# EAGLE board ARTIC_R2-Panel (EAGLE 9.6.2), part 1 of 4
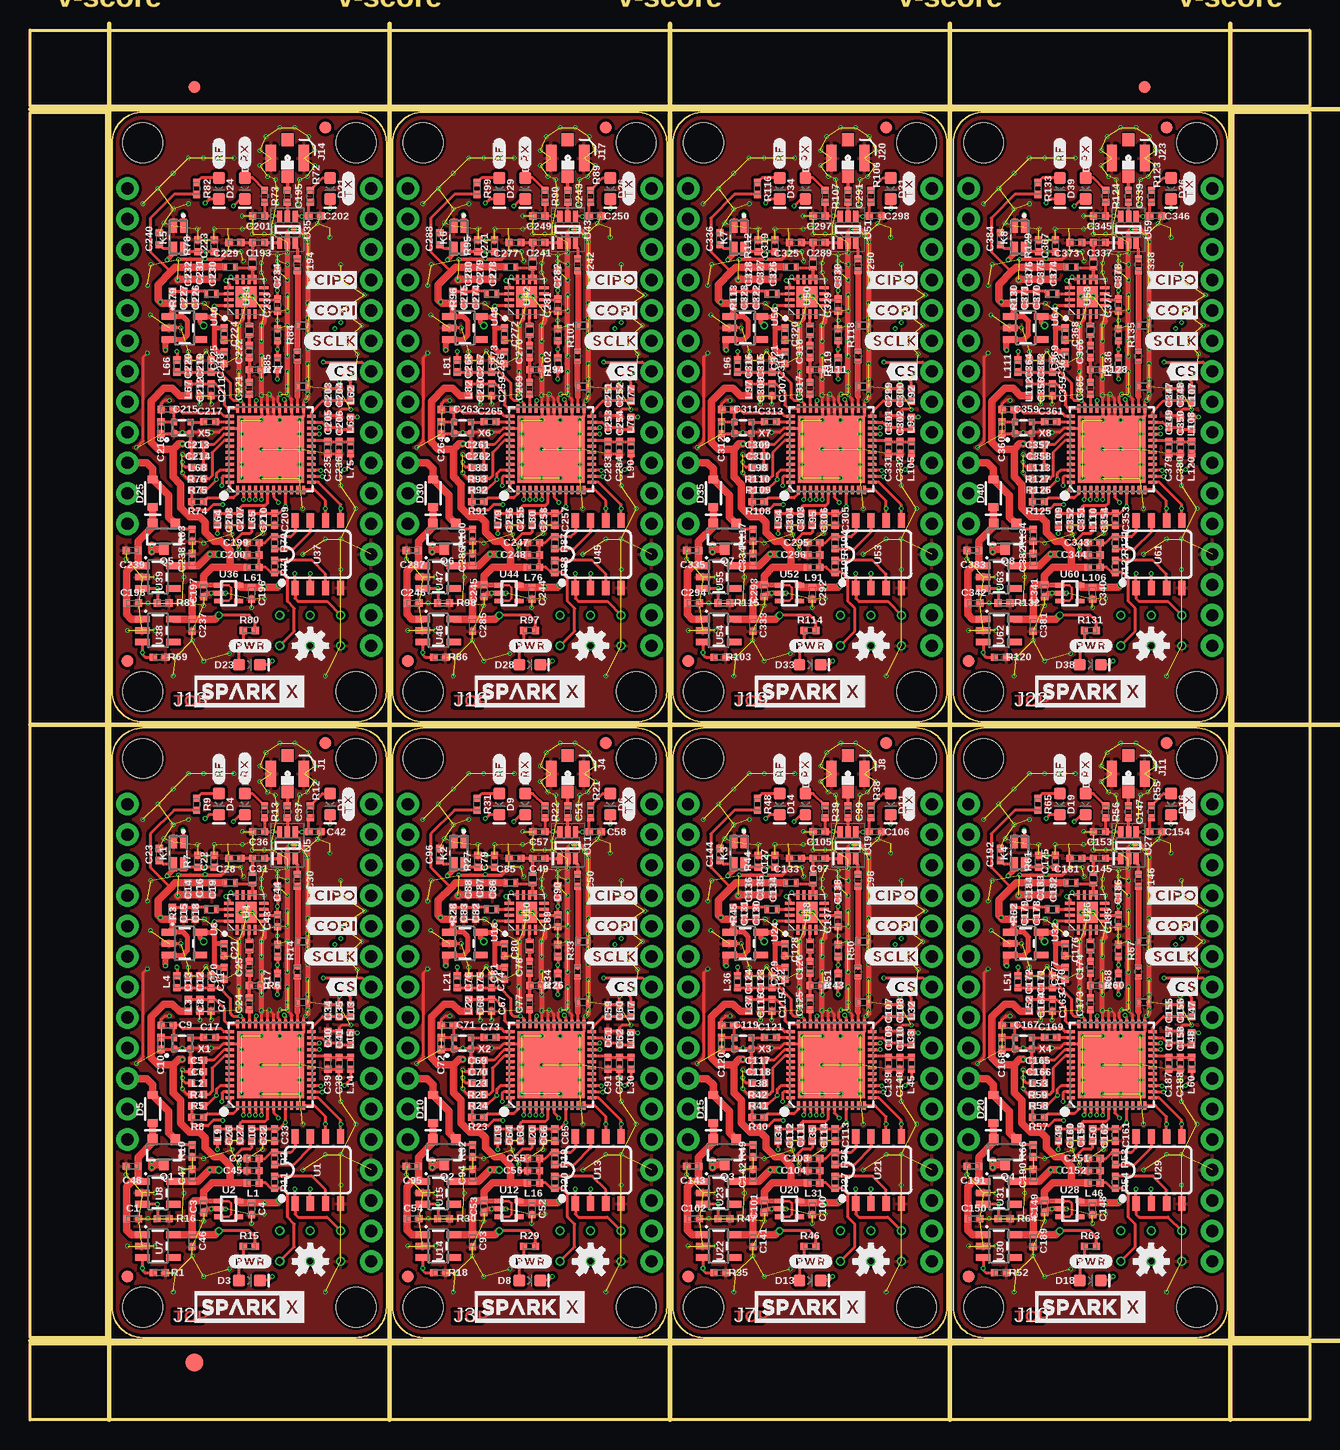
[diagram p0: board, top side]
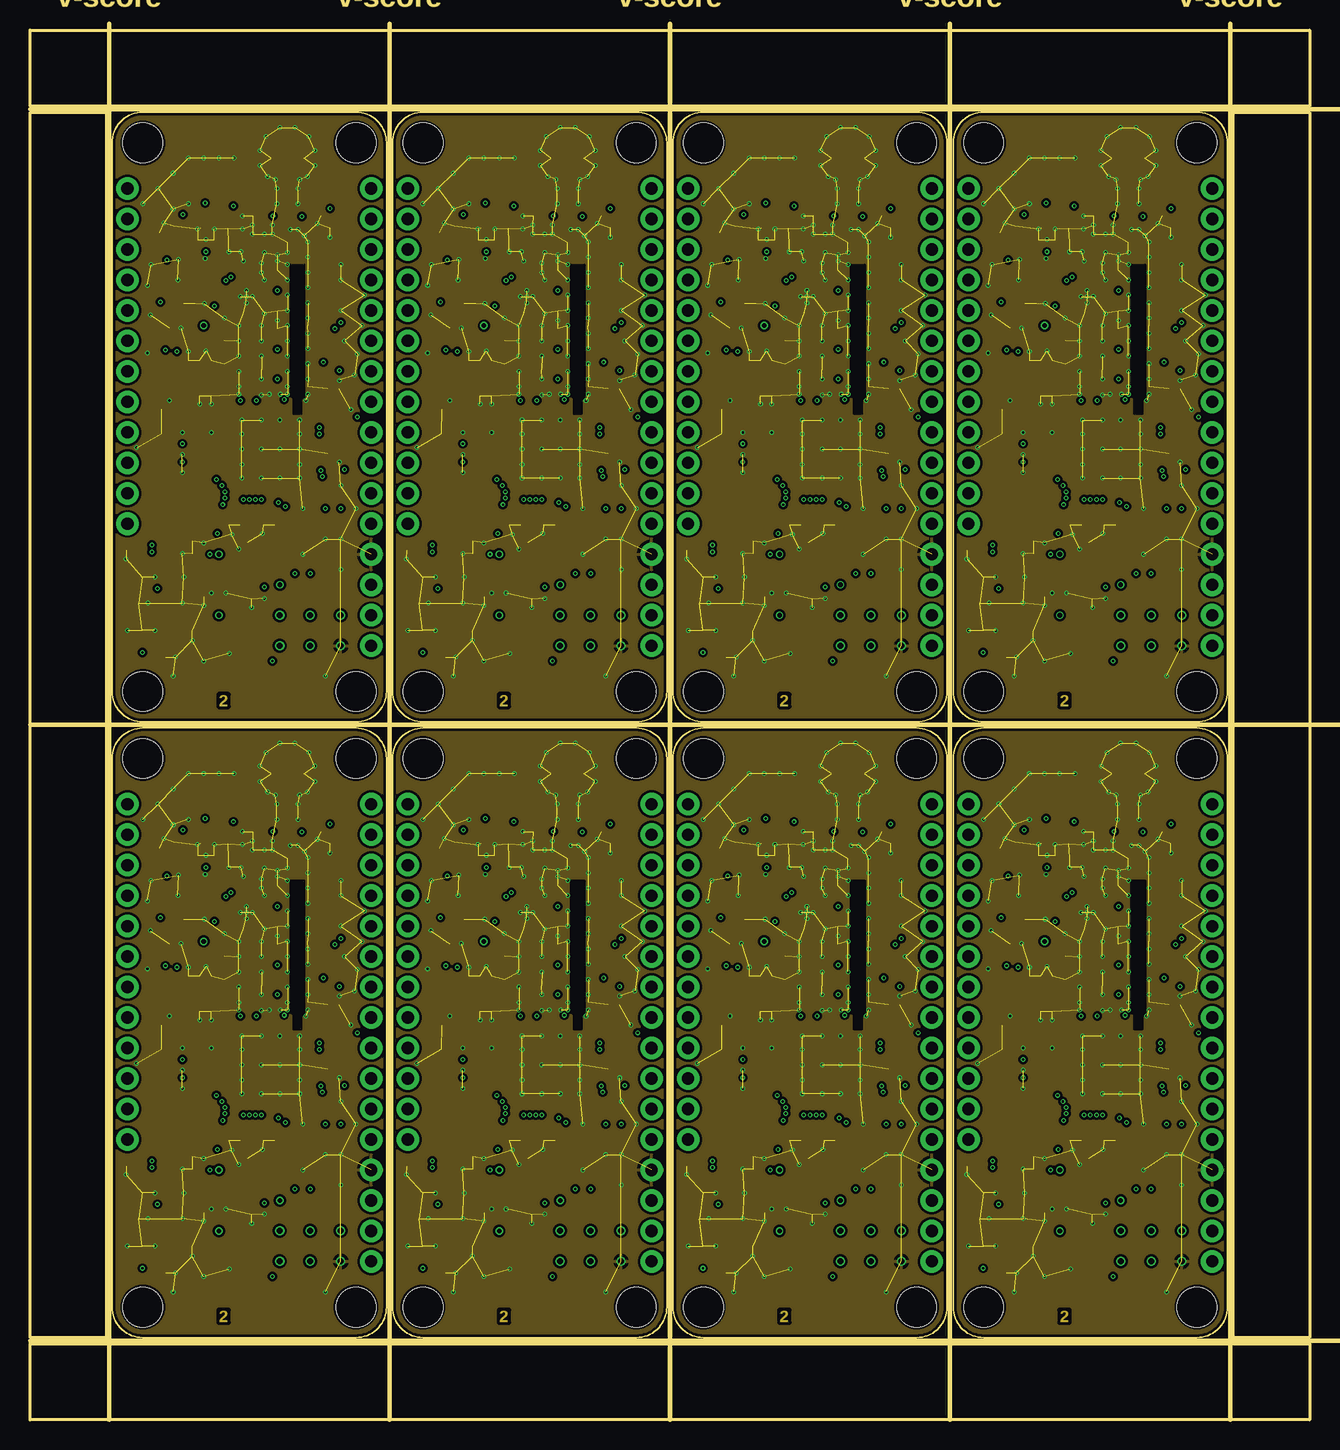
[diagram p1: board, inner layer Route2]
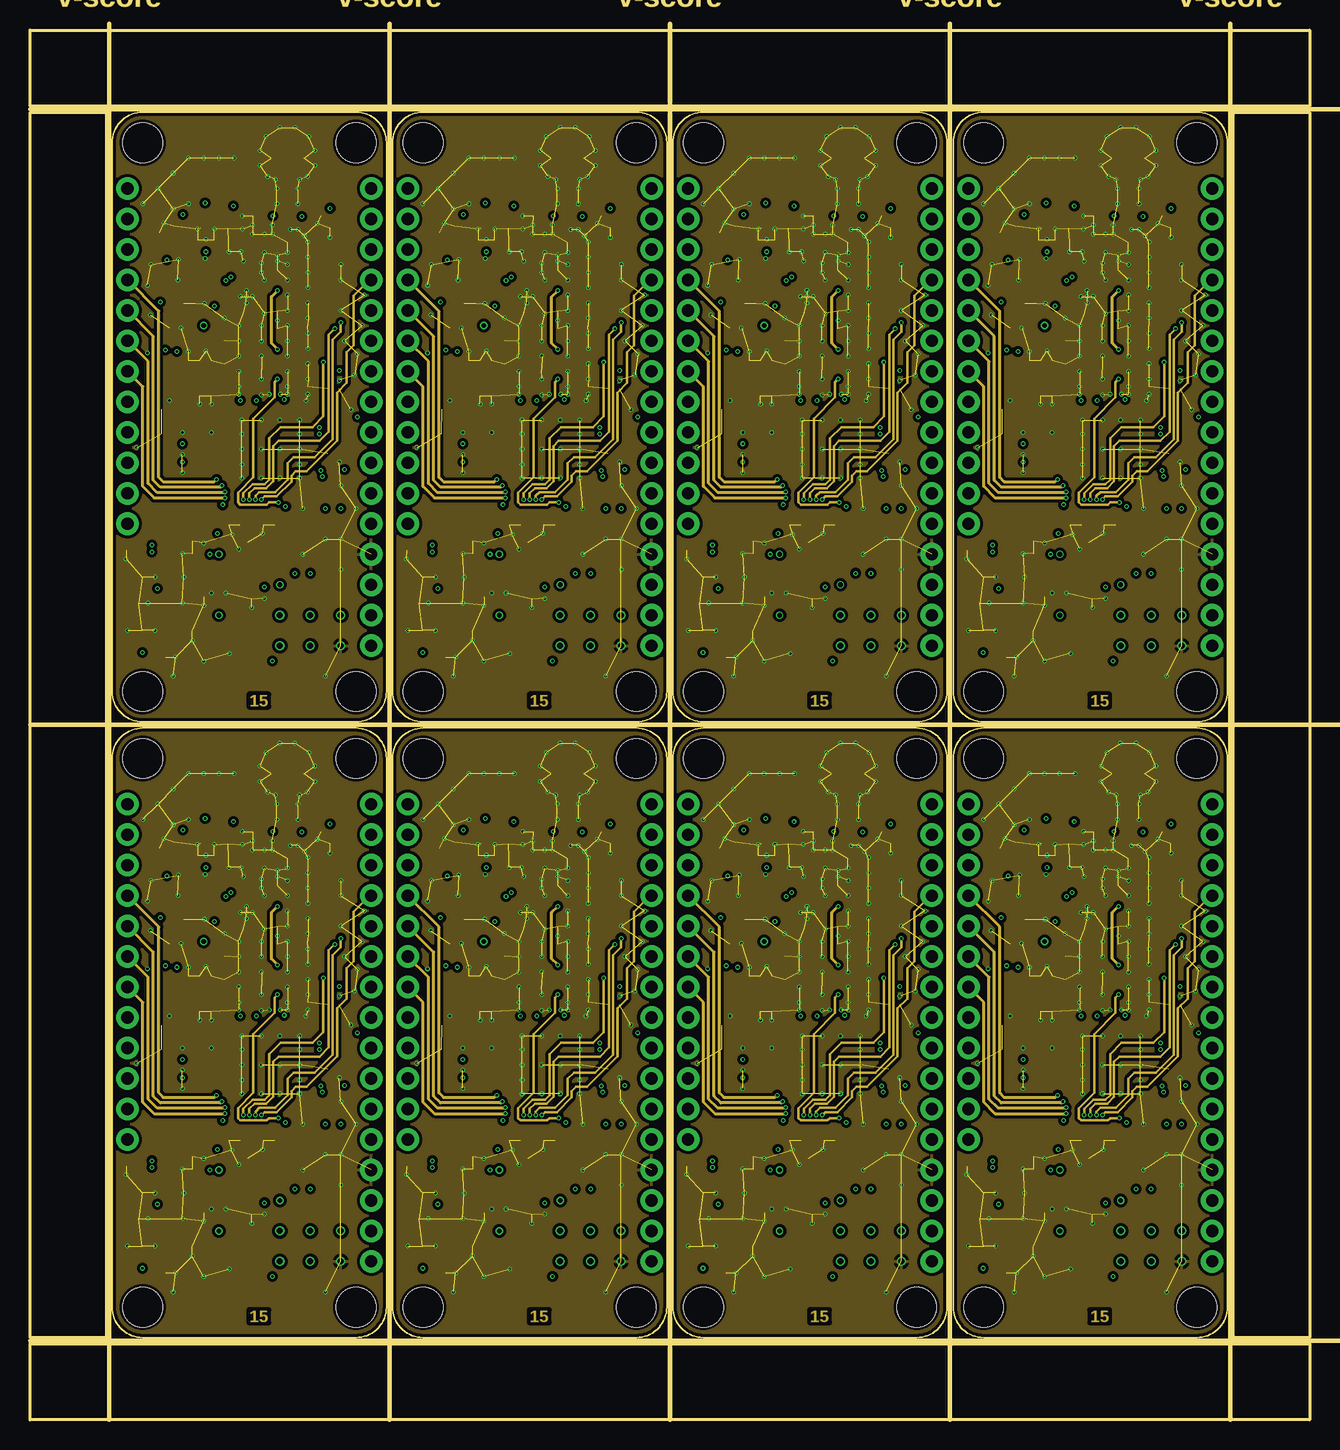
[diagram p2: board, inner layer Route15]
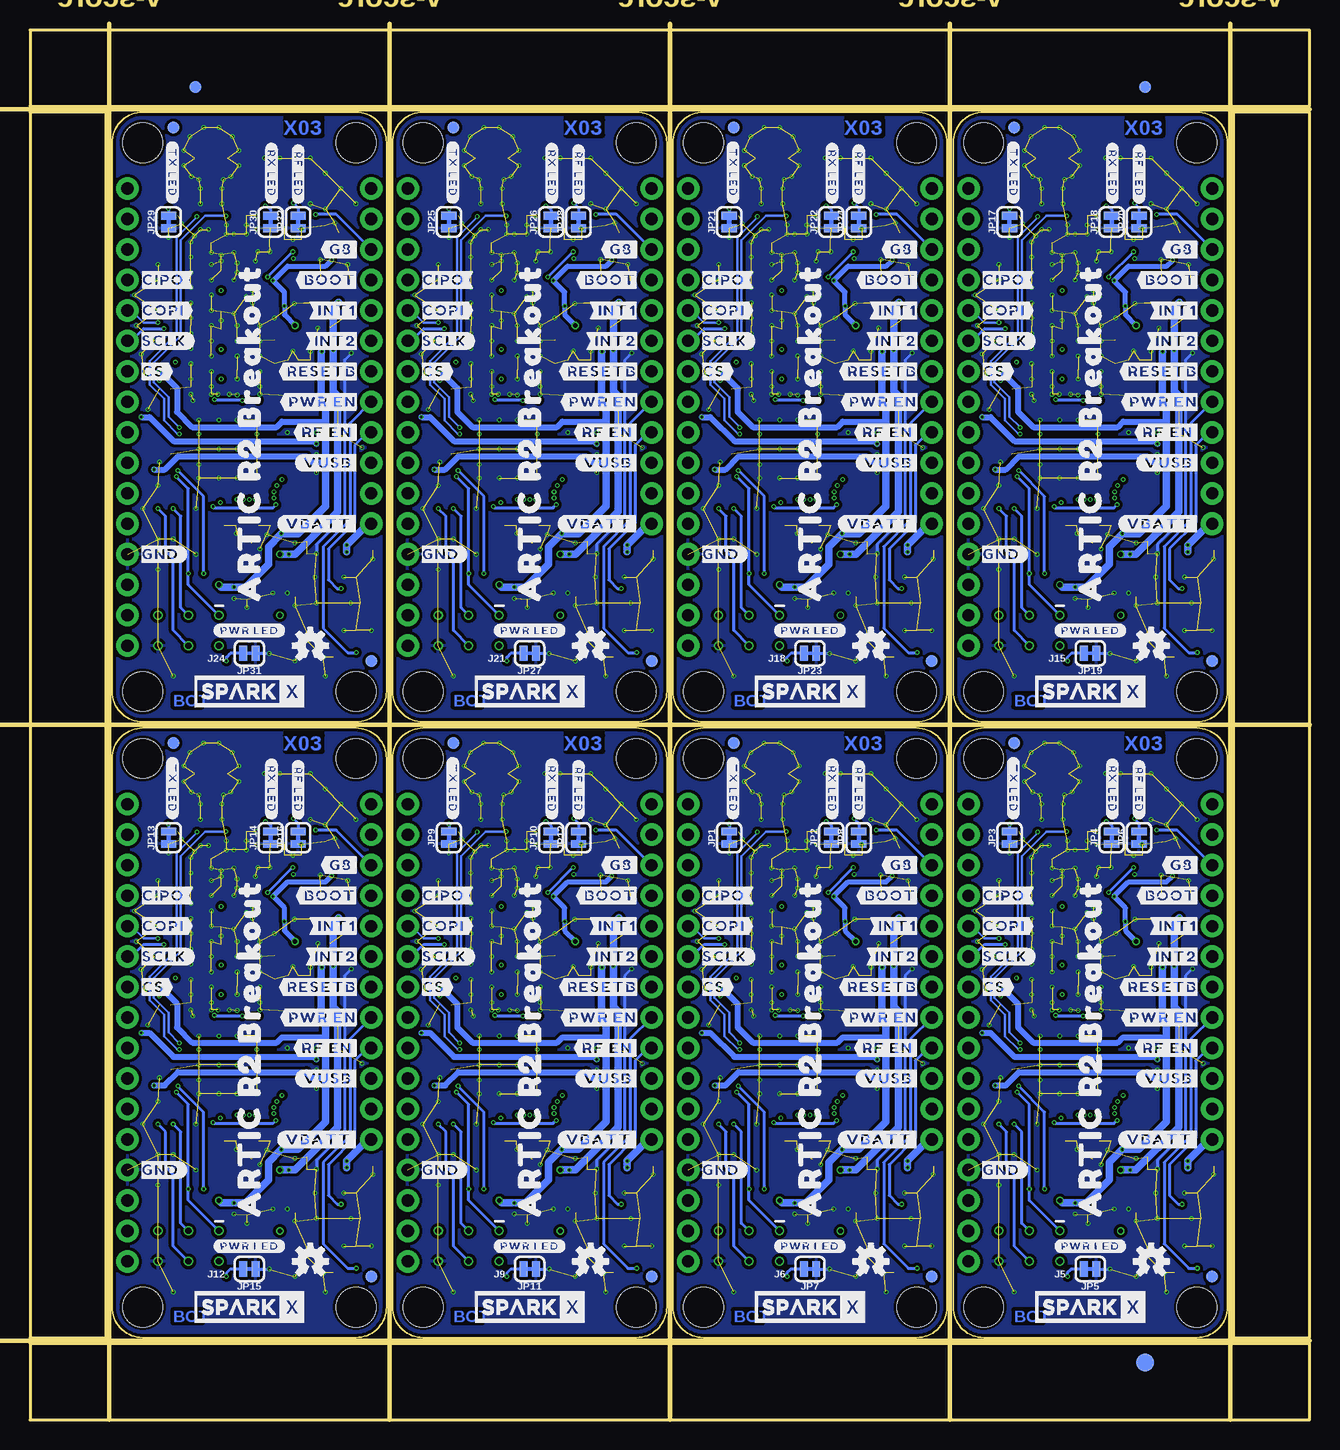
[diagram p3: board, bottom side, seen from below]

Size 106.68 x 115.82 mm. Coordinates in mm from the lower left corner, seen from the top.
Outline: 6.86,55.12 6.86,9.4 arc90 9.4,6.86 27.18,6.86 arc90 29.72,9.4 29.72,55.12 arc90 27.18,57.66 9.4,57.66 arc90 6.86,55.12
Outline: 30.23,55.12 30.23,9.4 arc90 32.77,6.86 50.55,6.86 arc90 53.09,9.4 53.09,55.12 arc90 50.55,57.66 32.77,57.66 arc90 30.23,55.12
Outline: 53.59,55.12 53.59,9.4 arc90 56.13,6.86 73.91,6.86 arc90 76.45,9.4 76.45,55.12 arc90 73.91,57.66 56.13,57.66 arc90 53.59,55.12
Outline: 76.96,55.12 76.96,9.4 arc90 79.5,6.86 97.28,6.86 arc90 99.82,9.4 99.82,55.12 arc90 97.28,57.66 79.5,57.66 arc90 76.96,55.12
Outline: 6.86,106.43 6.86,60.71 arc90 9.4,58.17 27.18,58.17 arc90 29.72,60.71 29.72,106.43 arc90 27.18,108.97 9.4,108.97 arc90 6.86,106.43
Outline: 30.23,106.43 30.23,60.71 arc90 32.77,58.17 50.55,58.17 arc90 53.09,60.71 53.09,106.43 arc90 50.55,108.97 32.77,108.97 arc90 30.23,106.43
Outline: 53.59,106.43 53.59,60.71 arc90 56.13,58.17 73.91,58.17 arc90 76.45,60.71 76.45,106.43 arc90 73.91,108.97 56.13,108.97 arc90 53.59,106.43
Outline: 76.96,106.43 76.96,60.71 arc90 79.5,58.17 97.28,58.17 arc90 99.82,60.71 99.82,106.43 arc90 97.28,108.97 79.5,108.97 arc90 76.96,106.43
Outline: 0,6.35 106.68,6.35 106.68,0 0,0 0,6.35
Outline: 100.33,108.97 106.68,108.97 106.68,6.86 100.33,6.86 100.33,108.97
Outline: 0,115.82 106.68,115.82 106.68,109.47 0,109.47 0,115.82
Outline: 0,108.97 6.35,108.97 6.35,6.86 0,6.86 0,108.97
Copper layers (1+2*15+16): Top 0.035mm / dielectric 0.2mm / Route2 0.0175mm / dielectric 0.265mm / Route15 0.0175mm / dielectric 0.2mm / Bottom 0.035mm
Design rules "ARTIC_R2": minimum track width 5mil, minimum drill 0.2mm, track to track 5mil, track to pad 5mil, pad to pad 5mil, via to via 5mil, smd to smd 0mil, copper to edge 5mil, drill to drill 5mil, minimum pad ring 3.5mil, minimum via ring 3.5mil, stop-mask expansion 4mil, vias tented up to drill 25mil, thermal gap 10mil
tRestrict: area 20.8,53 to 22.1,54.7; area 44.2,53 to 45.5,54.7; area 67.6,53 to 68.8,54.7; area 90.9,53 to 92.2,54.7; area 20.8,104.3 to 22.1,106; area 44.2,104.3 to 45.5,106; area 67.6,104.3 to 68.8,106; area 90.9,104.3 to 92.2,106
Milling: 8 lines

## Footprints (pad centres in the part's own frame; a part is rotated, then mirrored left to right if it is on the bottom)
0402-TIGHT = smd 0.6 x 0.6: 1 -0.5,0; 2 0.5,0
0402_MURATA = smd 0.4 x 0.6: P$1 -0.4,0; P$2 0.4,0
LED-0603 = smd 1 x 1: A -0.877,0; C 0.877,0
SOD-323 = smd 0.63 x 0.83: A 1.15,0; C -1.15,0
FIDUCIAL-1X2 = smd 1 x 1: 1 0,0
FIDUCIAL-1.5X3 = smd 1.5 x 1.5: 1 0,0
U.FL = smd 2.2 x 0.85: 1 0,1.375; 2 0,-1.375 | smd 1.05 x 1: FEED 1.525,0; NC -1.525,0
THING_PLUS = drill 1.016 pad 1.88: 1 -10.16,19.05; 2 -10.16,16.51; 3 -10.16,13.97; 4 -10.16,11.43; 5 -10.16,8.89; 6 -10.16,6.35; 7 -10.16,3.81; 8 -10.16,1.27; 9 -10.16,-1.27; 10 -10.16,-3.81; 11 -10.16,-6.35; 12 -10.16,-8.89; 13 10.16,19.05; 14 10.16,16.51; 15 10.16,13.97; 16 10.16,11.43; 17 10.16,8.89; 18 10.16,6.35; 19 10.16,3.81; 20 10.16,1.27; 21 10.16,-1.27; 22 10.16,-3.81; 23 10.16,-6.35; 24 10.16,-8.89; 25 10.16,-11.43; 26 10.16,-13.97; 27 10.16,-16.51; 28 10.16,-19.05 | hole 3.302: -8.89,-22.86; 8.89,-22.86; 8.89,22.86; -8.89,22.86
2X3_TEST_POINTS = drill 0.508: 1 -2.54,-1.27; 2 -2.54,1.27; 3 0,-1.27; 4 0,1.27; 5 2.54,-1.27; 6 2.54,1.27
SMT-JUMPER_2_NC_TRACE_SILK = smd 0.66 x 1.27: 1 -0.521,0; 2 0.521,0
TLP3475RTPF = smd 1.15 x 0.55: 1 -0.95,0.4; 2 -0.95,-0.4; 3 0.95,-0.4; 4 0.95,0.4
0402_COILCRAFT = smd 0.356 x 0.66: P$1 -0.432,0; P$2 0.432,0
SOT23-3 = smd 0.8 x 0.9: 1 -0.95,-1; 2 0.95,-1; 3 0,1.1
TP_15TH = drill 0.381 pad 0.61: P$1 0,0
SO08 = smd 0.6 x 1.2: 1 -1.905,-2.8; 2 -0.635,-2.8; 3 0.635,-2.8; 4 1.905,-2.8; 5 1.905,2.8; 6 0.635,2.8; 7 -0.635,2.8; 8 -1.905,2.8
SC70 = smd 0.4 x 0.75: 1 -0.65,-0.825; 2 0,-0.825; 3 0.65,-0.825; 4 0.65,0.825; 5 -0.65,0.825
QFN-48 = smd 0.7 x 0.25: 1 -3.4,2.75; 2 -3.4,2.25; 3 -3.4,1.75; 4 -3.4,1.25; 5 -3.4,0.75; 6 -3.4,0.25; 7 -3.4,-0.25; 8 -3.4,-0.75; 9 -3.4,-1.25; 10 -3.4,-1.75; 11 -3.4,-2.25; 12 -3.4,-2.75; 25 3.4,-2.75; 26 3.4,-2.25; 27 3.4,-1.75; 28 3.4,-1.25; 29 3.4,-0.75; 30 3.4,-0.25; 31 3.4,0.25; 32 3.4,0.75; 33 3.4,1.25; 34 3.4,1.75; 35 3.4,2.25; 36 3.4,2.75 | smd 0.25 x 0.7: 13 -2.75,-3.4; 14 -2.25,-3.4; 15 -1.75,-3.4; 16 -1.25,-3.4; 17 -0.75,-3.4; 18 -0.25,-3.4; 19 0.25,-3.4; 20 0.75,-3.4; 21 1.25,-3.4; 22 1.75,-3.4; 23 2.25,-3.4; 24 2.75,-3.4; 37 2.75,3.4; 38 2.25,3.4; 39 1.75,3.4; 40 1.25,3.4; 41 0.75,3.4; 42 0.25,3.4; 43 -0.25,3.4; 44 -0.75,3.4; 45 -1.25,3.4; 46 -1.75,3.4; 47 -2.25,3.4; 48 -2.75,3.4 | smd 5.6 x 5.6: GND 0,0
QFN50P300X300X86-17N = smd 0.8 x 0.25: 1 -1.45,0.75; 2 -1.45,0.25; 3 -1.45,-0.25; 4 -1.45,-0.75; 9 1.45,-0.75; 10 1.45,-0.25; 11 1.45,0.25; 12 1.45,0.75 | smd 0.25 x 0.8: 5 -0.75,-1.45; 6 -0.25,-1.45; 7 0.25,-1.45; 8 0.75,-1.45; 13 0.75,1.45; 14 0.25,1.45; 15 -0.25,1.45; 16 -0.75,1.45 | smd 1.75 x 1.75: EDAP 0,0
SOT65P220X100-6N = smd 0.95 x 0.45: 1 -1.1,0.65; 2 -1.1,0; 3 -1.1,-0.65; 4 1.1,-0.65; 5 1.1,0; 6 1.1,0.65
SOT23-5 = smd 0.55 x 1.2: 1 -0.95,-1.3; 2 0,-1.3; 3 0.95,-1.3; 4 0.95,1.3; 5 -0.95,1.3
CRYSTAL-TCXO-SMD-1.65X1.25 = smd 0.5 x 0.55: 1 -0.7,-0.475; 2 0.7,-0.475; 3 0.7,0.475; 4 -0.7,0.475

## Placement (x,y rotation side)
C1  2.2uF  [0402-TIGHT]  8.57,16.76 0 top
C2  22pF  [0402-TIGHT]  18.61,21.78 180 top
C3  1.0uF  [0402-TIGHT]  14.48,17.78 270 top
C4  1.0uF  [0402-TIGHT]  18.48,17.59 270 top
C5  22pF  [0402-TIGHT]  13.97,29.97 180 top
C6  0.1uF  [0402-TIGHT]  13.97,29.02 180 top
C7  22pF  [0402-TIGHT]  15.11,34.54 270 top
C8  0.1uF  [0402-TIGHT]  14.16,34.54 270 top
C9  1.0uF  [0402-TIGHT]  11.43,32.89 180 top
C10  47nF  [0402-TIGHT]  10.92,31.37 270 top
C11  100pF  [0402-TIGHT]  15.11,36.51 90 top
C12  1.0uF  [0402-TIGHT]  14.16,36.51 90 top
C13  10uF  [0402-TIGHT]  13.21,36.51 90 top
C14  10uF  [0402-TIGHT]  13.14,44.26 270 top
C15  2.2uF  [0402-TIGHT]  12.83,42.23 270 top
C16  2.2uF  [0402-TIGHT]  14.16,44.26 270 top
C17  1.0nF  [0402-TIGHT]  14.99,31.88 0 top
C18  22pF  [0402-TIGHT]  13.78,42.23 270 top
C19  100pF  [0402-TIGHT]  15.18,44.26 270 top
C20  2.2uF  [0402-TIGHT]  16.19,37.21 90 top
C21  100pF  [0402-TIGHT]  16.19,39.18 90 top
C22  100pF  [0402-TIGHT]  15.37,46.55 270 top
C23  100pF  [0402-TIGHT]  10.79,47.12 90 top
C24  100pF  [0402-TIGHT]  18.29,34.67 90 top
C25  100pF  [0402-TIGHT]  18.29,37.72 90 top
C26  0.1uF  [0402-TIGHT]  16.57,23.75 270 top
C27  22pF  [0402-TIGHT]  17.53,23.75 270 top
C28  9.1pF  [0402-TIGHT]  17.08,46.8 0 top
C29  2.4 pF  [0402_MURATA]  22.29,37.34 90 top
C30  100pF  [0402-TIGHT]  22.29,44.96 270 top
C31  100pF  [0402-TIGHT]  19.05,46.8 180 top
C32  0.1uF  [0402-TIGHT]  19.43,23.75 270 top
C33  22pF  [0402-TIGHT]  20.38,23.75 270 top
C34  22pF  [0402-TIGHT]  24.83,34.1 90 top
C35  0.1uF  [0402-TIGHT]  25.78,34.1 90 top
C36  100pF  [0402-TIGHT]  19.05,49.02 180 top
C37  100pF  [0402-TIGHT]  21.46,50.67 270 top
C38  0.1uF  [0402-TIGHT]  25.78,29.72 270 top
C39  22pF  [0402-TIGHT]  24.83,29.72 270 top
C40  22pF  [0402-TIGHT]  24.83,31.88 90 top
C41  0.1uF  [0402-TIGHT]  25.78,31.75 90 top
C42  100pF  [0402-TIGHT]  23.75,49.02 0 top
C43  100pF  [0402-TIGHT]  20.64,41.59 90 top
C44  2.2uF  [0402-TIGHT]  20.64,44.01 90 top
C45  0.1uF  [0402-TIGHT]  18.61,20.76 180 top
C46  2.2uF  [0402-TIGHT]  13.53,14.92 270 top
C47  2.2uF  [0402-TIGHT]  13.53,20.38 90 top
C48  0.1uF  [0402-TIGHT]  8.51,21.15 180 top
C49  100pF  [0402-TIGHT]  42.42,46.8 180 top
C50  100pF  [0402-TIGHT]  45.66,44.96 270 top
C51  100pF  [0402-TIGHT]  44.83,50.67 270 top
C52  1.0uF  [0402-TIGHT]  41.85,17.59 270 top
C53  1.0uF  [0402-TIGHT]  37.85,17.78 270 top
C54  2.2uF  [0402-TIGHT]  31.94,16.76 0 top
C55  22pF  [0402-TIGHT]  41.97,21.78 180 top
C56  0.1uF  [0402-TIGHT]  41.97,20.76 180 top
C57  100pF  [0402-TIGHT]  42.42,49.02 180 top
C58  100pF  [0402-TIGHT]  47.12,49.02 0 top
C59  22pF  [0402-TIGHT]  48.2,34.1 90 top
C60  0.1uF  [0402-TIGHT]  49.15,34.1 90 top
C61  22pF  [0402-TIGHT]  48.2,31.88 90 top
C62  0.1uF  [0402-TIGHT]  49.15,31.75 90 top
C63  22pF  [0402-TIGHT]  40.89,23.75 270 top
C64  0.1uF  [0402-TIGHT]  39.94,23.75 270 top
C65  22pF  [0402-TIGHT]  43.75,23.75 270 top
C66  0.1uF  [0402-TIGHT]  42.8,23.75 270 top
C67  22pF  [0402-TIGHT]  38.48,34.54 270 top
C68  0.1uF  [0402-TIGHT]  37.53,34.54 270 top
C69  22pF  [0402-TIGHT]  37.34,29.97 180 top
C70  0.1uF  [0402-TIGHT]  37.34,29.02 180 top
C71  1.0uF  [0402-TIGHT]  34.8,32.89 180 top
C72  47nF  [0402-TIGHT]  34.29,31.37 270 top
C73  1.0nF  [0402-TIGHT]  38.35,31.88 0 top
C74  100pF  [0402-TIGHT]  38.48,36.51 90 top
C75  1.0uF  [0402-TIGHT]  37.53,36.51 90 top
C76  10uF  [0402-TIGHT]  36.58,36.51 90 top
C77  100pF  [0402-TIGHT]  41.66,34.67 90 top
C78  100pF  [0402-TIGHT]  41.66,37.72 90 top
C79  100pF  [0402-TIGHT]  38.73,46.55 270 top
C80  100pF  [0402-TIGHT]  39.56,39.18 90 top
C81  2.2uF  [0402-TIGHT]  39.56,37.21 90 top
C82  22pF  [0402-TIGHT]  37.15,42.23 270 top
C83  2.2uF  [0402-TIGHT]  36.2,42.23 270 top
C84  2.4 pF  [0402_MURATA]  45.66,37.34 90 top
C85  9.1pF  [0402-TIGHT]  40.45,46.8 0 top
C86  100pF  [0402-TIGHT]  38.54,44.26 270 top
C87  2.2uF  [0402-TIGHT]  37.53,44.26 270 top
C88  10uF  [0402-TIGHT]  36.51,44.26 270 top
C89  100pF  [0402-TIGHT]  44.01,41.59 90 top
C90  2.2uF  [0402-TIGHT]  44.01,44.01 90 top
C91  22pF  [0402-TIGHT]  48.2,29.72 270 top
C92  0.1uF  [0402-TIGHT]  49.15,29.72 270 top
C93  2.2uF  [0402-TIGHT]  36.89,14.92 270 top
C94  2.2uF  [0402-TIGHT]  36.89,20.38 90 top
C95  0.1uF  [0402-TIGHT]  31.88,21.15 180 top
C96  100pF  [0402-TIGHT]  34.16,47.12 90 top
C97  100pF  [0402-TIGHT]  65.79,46.8 180 top
C98  100pF  [0402-TIGHT]  69.02,44.96 270 top
C99  100pF  [0402-TIGHT]  68.2,50.67 270 top
C100  1.0uF  [0402-TIGHT]  65.21,17.59 270 top
C101  1.0uF  [0402-TIGHT]  61.21,17.78 270 top
C102  2.2uF  [0402-TIGHT]  55.31,16.76 0 top
C103  22pF  [0402-TIGHT]  65.34,21.78 180 top
C104  0.1uF  [0402-TIGHT]  65.34,20.76 180 top
C105  100pF  [0402-TIGHT]  65.79,49.02 180 top
C106  100pF  [0402-TIGHT]  70.48,49.02 0 top
C107  22pF  [0402-TIGHT]  71.56,34.1 90 top
C108  0.1uF  [0402-TIGHT]  72.52,34.1 90 top
C109  22pF  [0402-TIGHT]  71.56,31.88 90 top
C110  0.1uF  [0402-TIGHT]  72.52,31.75 90 top
C111  22pF  [0402-TIGHT]  64.26,23.75 270 top
C112  0.1uF  [0402-TIGHT]  63.31,23.75 270 top
C113  22pF  [0402-TIGHT]  67.12,23.75 270 top
C114  0.1uF  [0402-TIGHT]  66.17,23.75 270 top
C115  22pF  [0402-TIGHT]  61.85,34.54 270 top
C116  0.1uF  [0402-TIGHT]  60.9,34.54 270 top
C117  22pF  [0402-TIGHT]  60.71,29.97 180 top
C118  0.1uF  [0402-TIGHT]  60.71,29.02 180 top
C119  1.0uF  [0402-TIGHT]  58.17,32.89 180 top
C120  47nF  [0402-TIGHT]  57.66,31.37 270 top
C121  1.0nF  [0402-TIGHT]  61.72,31.88 0 top
C122  100pF  [0402-TIGHT]  61.85,36.51 90 top
C123  1.0uF  [0402-TIGHT]  60.9,36.51 90 top
C124  10uF  [0402-TIGHT]  59.94,36.51 90 top
C125  100pF  [0402-TIGHT]  65.02,34.67 90 top
C126  100pF  [0402-TIGHT]  65.02,37.72 90 top
C127  100pF  [0402-TIGHT]  62.1,46.55 270 top
C128  100pF  [0402-TIGHT]  62.93,39.18 90 top
C129  2.2uF  [0402-TIGHT]  62.93,37.21 90 top
C130  22pF  [0402-TIGHT]  60.52,42.23 270 top
C131  2.2uF  [0402-TIGHT]  59.56,42.23 270 top
C132  2.4 pF  [0402_MURATA]  69.02,37.34 90 top
C133  9.1pF  [0402-TIGHT]  63.82,46.8 0 top
C134  100pF  [0402-TIGHT]  61.91,44.26 270 top
C135  2.2uF  [0402-TIGHT]  60.9,44.26 270 top
C136  10uF  [0402-TIGHT]  59.88,44.26 270 top
C137  100pF  [0402-TIGHT]  67.37,41.59 90 top
C138  2.2uF  [0402-TIGHT]  67.37,44.01 90 top
C139  22pF  [0402-TIGHT]  71.56,29.72 270 top
C140  0.1uF  [0402-TIGHT]  72.52,29.72 270 top
C141  2.2uF  [0402-TIGHT]  60.26,14.92 270 top
C142  2.2uF  [0402-TIGHT]  60.26,20.38 90 top
C143  0.1uF  [0402-TIGHT]  55.24,21.15 180 top
C144  100pF  [0402-TIGHT]  57.53,47.12 90 top
C145  100pF  [0402-TIGHT]  89.15,46.8 180 top
C146  100pF  [0402-TIGHT]  92.39,44.96 270 top
C147  100pF  [0402-TIGHT]  91.57,50.67 270 top
C148  1.0uF  [0402-TIGHT]  88.58,17.59 270 top
C149  1.0uF  [0402-TIGHT]  84.58,17.78 270 top
C150  2.2uF  [0402-TIGHT]  78.68,16.76 0 top
C151  22pF  [0402-TIGHT]  88.71,21.78 180 top
C152  0.1uF  [0402-TIGHT]  88.71,20.76 180 top
C153  100pF  [0402-TIGHT]  89.15,49.02 180 top
C154  100pF  [0402-TIGHT]  93.85,49.02 0 top
C155  22pF  [0402-TIGHT]  94.93,34.1 90 top
C156  0.1uF  [0402-TIGHT]  95.89,34.1 90 top
C157  22pF  [0402-TIGHT]  94.93,31.88 90 top
C158  0.1uF  [0402-TIGHT]  95.89,31.75 90 top
C159  22pF  [0402-TIGHT]  87.63,23.75 270 top
C160  0.1uF  [0402-TIGHT]  86.68,23.75 270 top
C161  22pF  [0402-TIGHT]  90.49,23.75 270 top
C162  0.1uF  [0402-TIGHT]  89.54,23.75 270 top
C163  22pF  [0402-TIGHT]  85.22,34.54 270 top
C164  0.1uF  [0402-TIGHT]  84.26,34.54 270 top
C165  22pF  [0402-TIGHT]  84.07,29.97 180 top
C166  0.1uF  [0402-TIGHT]  84.07,29.02 180 top
C167  1.0uF  [0402-TIGHT]  81.53,32.89 180 top
C168  47nF  [0402-TIGHT]  81.03,31.37 270 top
C169  1.0nF  [0402-TIGHT]  85.09,31.88 0 top
C170  100pF  [0402-TIGHT]  85.22,36.51 90 top
C171  1.0uF  [0402-TIGHT]  84.26,36.51 90 top
C172  10uF  [0402-TIGHT]  83.31,36.51 90 top
C173  100pF  [0402-TIGHT]  88.39,34.67 90 top
C174  100pF  [0402-TIGHT]  88.39,37.72 90 top
C175  100pF  [0402-TIGHT]  85.47,46.55 270 top
C176  100pF  [0402-TIGHT]  86.3,39.18 90 top
C177  2.2uF  [0402-TIGHT]  86.3,37.21 90 top
C178  22pF  [0402-TIGHT]  83.88,42.23 270 top
C179  2.2uF  [0402-TIGHT]  82.93,42.23 270 top
C180  2.4 pF  [0402_MURATA]  92.39,37.34 90 top
C181  9.1pF  [0402-TIGHT]  87.19,46.8 0 top
C182  100pF  [0402-TIGHT]  85.28,44.26 270 top
C183  2.2uF  [0402-TIGHT]  84.26,44.26 270 top
C184  10uF  [0402-TIGHT]  83.25,44.26 270 top
C185  100pF  [0402-TIGHT]  90.74,41.59 90 top
C186  2.2uF  [0402-TIGHT]  90.74,44.01 90 top
C187  22pF  [0402-TIGHT]  94.93,29.72 270 top
C188  0.1uF  [0402-TIGHT]  95.89,29.72 270 top
C189  2.2uF  [0402-TIGHT]  83.63,14.92 270 top
C190  2.2uF  [0402-TIGHT]  83.63,20.38 90 top
C191  0.1uF  [0402-TIGHT]  78.61,21.15 180 top
C192  100pF  [0402-TIGHT]  80.9,47.12 90 top
C193  100pF  [0402-TIGHT]  19.05,98.11 180 top
C194  100pF  [0402-TIGHT]  22.29,96.27 270 top
C195  100pF  [0402-TIGHT]  21.46,101.98 270 top
C196  1.0uF  [0402-TIGHT]  18.48,68.9 270 top
C197  1.0uF  [0402-TIGHT]  14.48,69.09 270 top
C198  2.2uF  [0402-TIGHT]  8.57,68.07 0 top
C199  22pF  [0402-TIGHT]  18.61,73.09 180 top
C200  0.1uF  [0402-TIGHT]  18.61,72.07 180 top
C201  100pF  [0402-TIGHT]  19.05,100.33 180 top
C202  100pF  [0402-TIGHT]  23.75,100.33 0 top
C203  22pF  [0402-TIGHT]  24.83,85.41 90 top
C204  0.1uF  [0402-TIGHT]  25.78,85.41 90 top
C205  22pF  [0402-TIGHT]  24.83,83.19 90 top
C206  0.1uF  [0402-TIGHT]  25.78,83.06 90 top
C207  22pF  [0402-TIGHT]  17.53,75.06 270 top
C208  0.1uF  [0402-TIGHT]  16.57,75.06 270 top
C209  22pF  [0402-TIGHT]  20.38,75.06 270 top
C210  0.1uF  [0402-TIGHT]  19.43,75.06 270 top
C211  22pF  [0402-TIGHT]  15.11,85.85 270 top
C212  0.1uF  [0402-TIGHT]  14.16,85.85 270 top
C213  22pF  [0402-TIGHT]  13.97,81.28 180 top
C214  0.1uF  [0402-TIGHT]  13.97,80.33 180 top
C215  1.0uF  [0402-TIGHT]  11.43,84.2 180 top
C216  47nF  [0402-TIGHT]  10.92,82.68 270 top
C217  1.0nF  [0402-TIGHT]  14.99,83.19 0 top
C218  100pF  [0402-TIGHT]  15.11,87.82 90 top
C219  1.0uF  [0402-TIGHT]  14.16,87.82 90 top
C220  10uF  [0402-TIGHT]  13.21,87.82 90 top
C221  100pF  [0402-TIGHT]  18.29,85.98 90 top
C222  100pF  [0402-TIGHT]  18.29,89.03 90 top
C223  100pF  [0402-TIGHT]  15.37,97.85 270 top
C224  100pF  [0402-TIGHT]  16.19,90.49 90 top
C225  2.2uF  [0402-TIGHT]  16.19,88.52 90 top
C226  22pF  [0402-TIGHT]  13.78,93.54 270 top
C227  2.2uF  [0402-TIGHT]  12.83,93.54 270 top
C228  2.4 pF  [0402_MURATA]  22.29,88.65 90 top
C229  9.1pF  [0402-TIGHT]  17.08,98.11 0 top
C230  100pF  [0402-TIGHT]  15.18,95.57 270 top
C231  2.2uF  [0402-TIGHT]  14.16,95.57 270 top
C232  10uF  [0402-TIGHT]  13.14,95.57 270 top
C233  100pF  [0402-TIGHT]  20.64,92.9 90 top
C234  2.2uF  [0402-TIGHT]  20.64,95.31 90 top
C235  22pF  [0402-TIGHT]  24.83,81.03 270 top
C236  0.1uF  [0402-TIGHT]  25.78,81.03 270 top
C237  2.2uF  [0402-TIGHT]  13.53,66.23 270 top
C238  2.2uF  [0402-TIGHT]  13.53,71.69 90 top
C239  0.1uF  [0402-TIGHT]  8.51,72.45 180 top
C240  100pF  [0402-TIGHT]  10.79,98.42 90 top
C241  100pF  [0402-TIGHT]  42.42,98.11 180 top
C242  100pF  [0402-TIGHT]  45.66,96.27 270 top
C243  100pF  [0402-TIGHT]  44.83,101.98 270 top
C244  1.0uF  [0402-TIGHT]  41.85,68.9 270 top
C245  1.0uF  [0402-TIGHT]  37.85,69.09 270 top
C246  2.2uF  [0402-TIGHT]  31.94,68.07 0 top
C247  22pF  [0402-TIGHT]  41.97,73.09 180 top
C248  0.1uF  [0402-TIGHT]  41.97,72.07 180 top
C249  100pF  [0402-TIGHT]  42.42,100.33 180 top
C250  100pF  [0402-TIGHT]  47.12,100.33 0 top
C251  22pF  [0402-TIGHT]  48.2,85.41 90 top
C252  0.1uF  [0402-TIGHT]  49.15,85.41 90 top
C253  22pF  [0402-TIGHT]  48.2,83.19 90 top
C254  0.1uF  [0402-TIGHT]  49.15,83.06 90 top
C255  22pF  [0402-TIGHT]  40.89,75.06 270 top
C256  0.1uF  [0402-TIGHT]  39.94,75.06 270 top
C257  22pF  [0402-TIGHT]  43.75,75.06 270 top
C258  0.1uF  [0402-TIGHT]  42.8,75.06 270 top
C259  22pF  [0402-TIGHT]  38.48,85.85 270 top
C260  0.1uF  [0402-TIGHT]  37.53,85.85 270 top
C261  22pF  [0402-TIGHT]  37.34,81.28 180 top
C262  0.1uF  [0402-TIGHT]  37.34,80.33 180 top
C263  1.0uF  [0402-TIGHT]  34.8,84.2 180 top
C264  47nF  [0402-TIGHT]  34.29,82.68 270 top
C265  1.0nF  [0402-TIGHT]  38.35,83.19 0 top
C266  100pF  [0402-TIGHT]  38.48,87.82 90 top
C267  1.0uF  [0402-TIGHT]  37.53,87.82 90 top
C268  10uF  [0402-TIGHT]  36.58,87.82 90 top
C269  100pF  [0402-TIGHT]  41.66,85.98 90 top
C270  100pF  [0402-TIGHT]  41.66,89.03 90 top
C271  100pF  [0402-TIGHT]  38.73,97.85 270 top
C272  100pF  [0402-TIGHT]  39.56,90.49 90 top
C273  2.2uF  [0402-TIGHT]  39.56,88.52 90 top
C274  22pF  [0402-TIGHT]  37.15,93.54 270 top
C275  2.2uF  [0402-TIGHT]  36.2,93.54 270 top
C276  2.4 pF  [0402_MURATA]  45.66,88.65 90 top
C277  9.1pF  [0402-TIGHT]  40.45,98.11 0 top
C278  100pF  [0402-TIGHT]  38.54,95.57 270 top
C279  2.2uF  [0402-TIGHT]  37.53,95.57 270 top
C280  10uF  [0402-TIGHT]  36.51,95.57 270 top
C281  100pF  [0402-TIGHT]  44.01,92.9 90 top
C282  2.2uF  [0402-TIGHT]  44.01,95.31 90 top
C283  22pF  [0402-TIGHT]  48.2,81.03 270 top
C284  0.1uF  [0402-TIGHT]  49.15,81.03 270 top
C285  2.2uF  [0402-TIGHT]  36.89,66.23 270 top
C286  2.2uF  [0402-TIGHT]  36.89,71.69 90 top
C287  0.1uF  [0402-TIGHT]  31.88,72.45 180 top
C288  100pF  [0402-TIGHT]  34.16,98.42 90 top
C289  100pF  [0402-TIGHT]  65.79,98.11 180 top
C290  100pF  [0402-TIGHT]  69.02,96.27 270 top
C291  100pF  [0402-TIGHT]  68.2,101.98 270 top
C292  1.0uF  [0402-TIGHT]  65.21,68.9 270 top
C293  1.0uF  [0402-TIGHT]  61.21,69.09 270 top
C294  2.2uF  [0402-TIGHT]  55.31,68.07 0 top
C295  22pF  [0402-TIGHT]  65.34,73.09 180 top
C296  0.1uF  [0402-TIGHT]  65.34,72.07 180 top
C297  100pF  [0402-TIGHT]  65.79,100.33 180 top
C298  100pF  [0402-TIGHT]  70.48,100.33 0 top
C299  22pF  [0402-TIGHT]  71.56,85.41 90 top
C300  0.1uF  [0402-TIGHT]  72.52,85.41 90 top
C301  22pF  [0402-TIGHT]  71.56,83.19 90 top
C302  0.1uF  [0402-TIGHT]  72.52,83.06 90 top
C303  22pF  [0402-TIGHT]  64.26,75.06 270 top
C304  0.1uF  [0402-TIGHT]  63.31,75.06 270 top
C305  22pF  [0402-TIGHT]  67.12,75.06 270 top
C306  0.1uF  [0402-TIGHT]  66.17,75.06 270 top
C307  22pF  [0402-TIGHT]  61.85,85.85 270 top
C308  0.1uF  [0402-TIGHT]  60.9,85.85 270 top
C309  22pF  [0402-TIGHT]  60.71,81.28 180 top
C310  0.1uF  [0402-TIGHT]  60.71,80.33 180 top
C311  1.0uF  [0402-TIGHT]  58.17,84.2 180 top
C312  47nF  [0402-TIGHT]  57.66,82.68 270 top
C313  1.0nF  [0402-TIGHT]  61.72,83.19 0 top
C314  100pF  [0402-TIGHT]  61.85,87.82 90 top
C315  1.0uF  [0402-TIGHT]  60.9,87.82 90 top
C316  10uF  [0402-TIGHT]  59.94,87.82 90 top
C317  100pF  [0402-TIGHT]  65.02,85.98 90 top
C318  100pF  [0402-TIGHT]  65.02,89.03 90 top
C319  100pF  [0402-TIGHT]  62.1,97.85 270 top
C320  100pF  [0402-TIGHT]  62.93,90.49 90 top
C321  2.2uF  [0402-TIGHT]  62.93,88.52 90 top
C322  22pF  [0402-TIGHT]  60.52,93.54 270 top
C323  2.2uF  [0402-TIGHT]  59.56,93.54 270 top
C324  2.4 pF  [0402_MURATA]  69.02,88.65 90 top
C325  9.1pF  [0402-TIGHT]  63.82,98.11 0 top
C326  100pF  [0402-TIGHT]  61.91,95.57 270 top
C327  2.2uF  [0402-TIGHT]  60.9,95.57 270 top
C328  10uF  [0402-TIGHT]  59.88,95.57 270 top
C329  100pF  [0402-TIGHT]  67.37,92.9 90 top
C330  2.2uF  [0402-TIGHT]  67.37,95.31 90 top
C331  22pF  [0402-TIGHT]  71.56,81.03 270 top
C332  0.1uF  [0402-TIGHT]  72.52,81.03 270 top
C333  2.2uF  [0402-TIGHT]  60.26,66.23 270 top
C334  2.2uF  [0402-TIGHT]  60.26,71.69 90 top
C335  0.1uF  [0402-TIGHT]  55.24,72.45 180 top
C336  100pF  [0402-TIGHT]  57.53,98.42 90 top
C337  100pF  [0402-TIGHT]  89.15,98.11 180 top
C338  100pF  [0402-TIGHT]  92.39,96.27 270 top
C339  100pF  [0402-TIGHT]  91.57,101.98 270 top
C340  1.0uF  [0402-TIGHT]  88.58,68.9 270 top
C341  1.0uF  [0402-TIGHT]  84.58,69.09 270 top
C342  2.2uF  [0402-TIGHT]  78.68,68.07 0 top
C343  22pF  [0402-TIGHT]  88.71,73.09 180 top
C344  0.1uF  [0402-TIGHT]  88.71,72.07 180 top
C345  100pF  [0402-TIGHT]  89.15,100.33 180 top
C346  100pF  [0402-TIGHT]  93.85,100.33 0 top
C347  22pF  [0402-TIGHT]  94.93,85.41 90 top
C348  0.1uF  [0402-TIGHT]  95.89,85.41 90 top
C349  22pF  [0402-TIGHT]  94.93,83.19 90 top
C350  0.1uF  [0402-TIGHT]  95.89,83.06 90 top
C351  22pF  [0402-TIGHT]  87.63,75.06 270 top
C352  0.1uF  [0402-TIGHT]  86.68,75.06 270 top
C353  22pF  [0402-TIGHT]  90.49,75.06 270 top
C354  0.1uF  [0402-TIGHT]  89.54,75.06 270 top
C355  22pF  [0402-TIGHT]  85.22,85.85 270 top
C356  0.1uF  [0402-TIGHT]  84.26,85.85 270 top
C357  22pF  [0402-TIGHT]  84.07,81.28 180 top
C358  0.1uF  [0402-TIGHT]  84.07,80.33 180 top
C359  1.0uF  [0402-TIGHT]  81.53,84.2 180 top
C360  47nF  [0402-TIGHT]  81.03,82.68 270 top
C361  1.0nF  [0402-TIGHT]  85.09,83.19 0 top
C362  100pF  [0402-TIGHT]  85.22,87.82 90 top
C363  1.0uF  [0402-TIGHT]  84.26,87.82 90 top
C364  10uF  [0402-TIGHT]  83.31,87.82 90 top
C365  100pF  [0402-TIGHT]  88.39,85.98 90 top
C366  100pF  [0402-TIGHT]  88.39,89.03 90 top
C367  100pF  [0402-TIGHT]  85.47,97.85 270 top
C368  100pF  [0402-TIGHT]  86.3,90.49 90 top
C369  2.2uF  [0402-TIGHT]  86.3,88.52 90 top
C370  22pF  [0402-TIGHT]  83.88,93.54 270 top
C371  2.2uF  [0402-TIGHT]  82.93,93.54 270 top
C372  2.4 pF  [0402_MURATA]  92.39,88.65 90 top
C373  9.1pF  [0402-TIGHT]  87.19,98.11 0 top
C374  100pF  [0402-TIGHT]  85.28,95.57 270 top
C375  2.2uF  [0402-TIGHT]  84.26,95.57 270 top
C376  10uF  [0402-TIGHT]  83.25,95.57 270 top
C377  100pF  [0402-TIGHT]  90.74,92.9 90 top
C378  2.2uF  [0402-TIGHT]  90.74,95.31 90 top
C379  22pF  [0402-TIGHT]  94.93,81.03 270 top
C380  0.1uF  [0402-TIGHT]  95.89,81.03 270 top
C381  2.2uF  [0402-TIGHT]  83.63,66.23 270 top
C382  2.2uF  [0402-TIGHT]  83.63,71.69 90 top
C383  0.1uF  [0402-TIGHT]  78.61,72.45 180 top
C384  100pF  [0402-TIGHT]  80.9,98.42 90 top
D1  Yellow  [LED-0603]  25.02,51.31 270 top
D2  Yellow  [LED-0603]  17.91,51.31 270 top
D3  RED  [LED-0603]  18.29,11.62 0 top
D4  RED  [LED-0603]  15.75,51.31 270 top
D5  1A/23V/620mV  [SOD-323]  10.22,25.91 90 top
D6  Yellow  [LED-0603]  48.39,51.31 270 top
D7  Yellow  [LED-0603]  41.27,51.31 270 top
D8  RED  [LED-0603]  41.66,11.62 0 top
D9  RED  [LED-0603]  39.12,51.31 270 top
D10  1A/23V/620mV  [SOD-323]  33.59,25.91 90 top
D11  Yellow  [LED-0603]  71.76,51.31 270 top
D12  Yellow  [LED-0603]  64.64,51.31 270 top
D13  RED  [LED-0603]  65.02,11.62 0 top
D14  RED  [LED-0603]  62.48,51.31 270 top
D15  1A/23V/620mV  [SOD-323]  56.96,25.91 90 top
D16  Yellow  [LED-0603]  95.12,51.31 270 top
D17  Yellow  [LED-0603]  88.01,51.31 270 top
D18  RED  [LED-0603]  88.39,11.62 0 top
D19  RED  [LED-0603]  85.85,51.31 270 top
D20  1A/23V/620mV  [SOD-323]  80.33,25.91 90 top
D21  Yellow  [LED-0603]  25.02,102.62 270 top
D22  Yellow  [LED-0603]  17.91,102.62 270 top
D23  RED  [LED-0603]  18.29,62.93 0 top
D24  RED  [LED-0603]  15.75,102.62 270 top
D25  1A/23V/620mV  [SOD-323]  10.22,77.22 90 top
D26  Yellow  [LED-0603]  48.39,102.62 270 top
D27  Yellow  [LED-0603]  41.27,102.62 270 top
D28  RED  [LED-0603]  41.66,62.93 0 top
D29  RED  [LED-0603]  39.12,102.62 270 top
D30  1A/23V/620mV  [SOD-323]  33.59,77.22 90 top
D31  Yellow  [LED-0603]  71.76,102.62 270 top
D32  Yellow  [LED-0603]  64.64,102.62 270 top
D33  RED  [LED-0603]  65.02,62.93 0 top
D34  RED  [LED-0603]  62.48,102.62 270 top
D35  1A/23V/620mV  [SOD-323]  56.96,77.22 90 top
D36  Yellow  [LED-0603]  95.12,102.62 270 top
D37  Yellow  [LED-0603]  88.01,102.62 270 top
D38  RED  [LED-0603]  88.39,62.93 0 top
D39  RED  [LED-0603]  85.85,102.62 270 top
D40  1A/23V/620mV  [SOD-323]  80.33,77.22 90 top
E$1  [FIDUCIAL-1X2]  13.72,111.06 0 top
E$2  [FIDUCIAL-1X2]  13.72,111.06 0 bottom
E$3  [FIDUCIAL-1X2]  92.9,111.06 0 top
E$4  [FIDUCIAL-1X2]  92.9,111.06 0 bottom
E$5  [FIDUCIAL-1.5X3]  13.72,4.76 0 top
E$6  [FIDUCIAL-1.5X3]  13.72,4.76 0 bottom
FD1  FIDUCIAL1X2  [FIDUCIAL-1X2]  24.64,56.39 0 top
FD2  FIDUCIAL1X2  [FIDUCIAL-1X2]  24.64,56.39 0 bottom
FD3  FIDUCIAL1X2  [FIDUCIAL-1X2]  8.13,11.94 0 top
FD4  FIDUCIAL1X2  [FIDUCIAL-1X2]  8.13,11.94 0 bottom
FD5  FIDUCIAL1X2  [FIDUCIAL-1X2]  48.01,56.39 0 top
FD6  FIDUCIAL1X2  [FIDUCIAL-1X2]  48.01,56.39 0 bottom
FD7  FIDUCIAL1X2  [FIDUCIAL-1X2]  31.5,11.94 0 top
FD8  FIDUCIAL1X2  [FIDUCIAL-1X2]  31.5,11.94 0 bottom
FD9  FIDUCIAL1X2  [FIDUCIAL-1X2]  71.37,56.39 0 top
FD10  FIDUCIAL1X2  [FIDUCIAL-1X2]  71.37,56.39 0 bottom
FD11  FIDUCIAL1X2  [FIDUCIAL-1X2]  54.86,11.94 0 top
FD12  FIDUCIAL1X2  [FIDUCIAL-1X2]  54.86,11.94 0 bottom
FD13  FIDUCIAL1X2  [FIDUCIAL-1X2]  94.74,56.39 0 top
FD14  FIDUCIAL1X2  [FIDUCIAL-1X2]  94.74,56.39 0 bottom
FD15  FIDUCIAL1X2  [FIDUCIAL-1X2]  78.23,11.94 0 top
FD16  FIDUCIAL1X2  [FIDUCIAL-1X2]  78.23,11.94 0 bottom
FD17  FIDUCIAL1X2  [FIDUCIAL-1X2]  24.64,107.7 0 top
FD18  FIDUCIAL1X2  [FIDUCIAL-1X2]  24.64,107.7 0 bottom
FD19  FIDUCIAL1X2  [FIDUCIAL-1X2]  8.13,63.25 0 top
FD20  FIDUCIAL1X2  [FIDUCIAL-1X2]  8.13,63.25 0 bottom
FD21  FIDUCIAL1X2  [FIDUCIAL-1X2]  48.01,107.7 0 top
FD22  FIDUCIAL1X2  [FIDUCIAL-1X2]  48.01,107.7 0 bottom
FD23  FIDUCIAL1X2  [FIDUCIAL-1X2]  31.5,63.25 0 top
FD24  FIDUCIAL1X2  [FIDUCIAL-1X2]  31.5,63.25 0 bottom
FD25  FIDUCIAL1X2  [FIDUCIAL-1X2]  71.37,107.7 0 top
FD26  FIDUCIAL1X2  [FIDUCIAL-1X2]  71.37,107.7 0 bottom
FD27  FIDUCIAL1X2  [FIDUCIAL-1X2]  54.86,63.25 0 top
FD28  FIDUCIAL1X2  [FIDUCIAL-1X2]  54.86,63.25 0 bottom
FD29  FIDUCIAL1X2  [FIDUCIAL-1X2]  94.74,107.7 0 top
FD30  FIDUCIAL1X2  [FIDUCIAL-1X2]  94.74,107.7 0 bottom
FD31  FIDUCIAL1X2  [FIDUCIAL-1X2]  78.23,63.25 0 top
FD32  FIDUCIAL1X2  [FIDUCIAL-1X2]  78.23,63.25 0 bottom
J1  U.FL  [U.FL]  21.46,53.85 270 top
J2  THING_PLUS  [THING_PLUS]  18.29,32.26 0 top
J3  THING_PLUS  [THING_PLUS]  41.66,32.26 0 top
J4  U.FL  [U.FL]  44.83,53.85 270 top
J5  Flash Programming  [2X3_TEST_POINTS]  23.37,14.48 180 bottom
J6  Flash Programming  [2X3_TEST_POINTS]  46.74,14.48 180 bottom
J7  THING_PLUS  [THING_PLUS]  65.02,32.26 0 top
J8  U.FL  [U.FL]  68.2,53.85 270 top
J9  Flash Programming  [2X3_TEST_POINTS]  70.1,14.48 180 bottom
J10  THING_PLUS  [THING_PLUS]  88.39,32.26 0 top
J11  U.FL  [U.FL]  91.57,53.85 270 top
J12  Flash Programming  [2X3_TEST_POINTS]  93.47,14.48 180 bottom
J13  THING_PLUS  [THING_PLUS]  18.29,83.57 0 top
J14  U.FL  [U.FL]  21.46,105.16 270 top
J15  Flash Programming  [2X3_TEST_POINTS]  23.37,65.79 180 bottom
J16  THING_PLUS  [THING_PLUS]  41.66,83.57 0 top
J17  U.FL  [U.FL]  44.83,105.16 270 top
J18  Flash Programming  [2X3_TEST_POINTS]  46.74,65.79 180 bottom
J19  THING_PLUS  [THING_PLUS]  65.02,83.57 0 top
J20  U.FL  [U.FL]  68.2,105.16 270 top
J21  Flash Programming  [2X3_TEST_POINTS]  70.1,65.79 180 bottom
J22  THING_PLUS  [THING_PLUS]  88.39,83.57 0 top
J23  U.FL  [U.FL]  91.57,105.16 270 top
J24  Flash Programming  [2X3_TEST_POINTS]  93.47,65.79 180 bottom
JP1  JUMPER-SMT_2_NC_TRACE_SILK  [SMT-JUMPER_2_NC_TRACE_SILK]  48.39,48.51 90 bottom
JP2  JUMPER-SMT_2_NC_TRACE_SILK  [SMT-JUMPER_2_NC_TRACE_SILK]  39.88,48.51 90 bottom
JP3  JUMPER-SMT_2_NC_TRACE_SILK  [SMT-JUMPER_2_NC_TRACE_SILK]  25.02,48.51 90 bottom
JP4  JUMPER-SMT_2_NC_TRACE_SILK  [SMT-JUMPER_2_NC_TRACE_SILK]  16.51,48.51 90 bottom
JP5  JUMPER-SMT_2_NC_TRACE_SILK  [SMT-JUMPER_2_NC_TRACE_SILK]  18.29,12.57 180 bottom
JP6  JUMPER-SMT_2_NC_TRACE_SILK  [SMT-JUMPER_2_NC_TRACE_SILK]  14.22,48.51 90 bottom
JP7  JUMPER-SMT_2_NC_TRACE_SILK  [SMT-JUMPER_2_NC_TRACE_SILK]  41.66,12.57 180 bottom
JP8  JUMPER-SMT_2_NC_TRACE_SILK  [SMT-JUMPER_2_NC_TRACE_SILK]  37.59,48.51 90 bottom
JP9  JUMPER-SMT_2_NC_TRACE_SILK  [SMT-JUMPER_2_NC_TRACE_SILK]  71.76,48.51 90 bottom
JP10  JUMPER-SMT_2_NC_TRACE_SILK  [SMT-JUMPER_2_NC_TRACE_SILK]  63.25,48.51 90 bottom
JP11  JUMPER-SMT_2_NC_TRACE_SILK  [SMT-JUMPER_2_NC_TRACE_SILK]  65.02,12.57 180 bottom
JP12  JUMPER-SMT_2_NC_TRACE_SILK  [SMT-JUMPER_2_NC_TRACE_SILK]  60.96,48.51 90 bottom
JP13  JUMPER-SMT_2_NC_TRACE_SILK  [SMT-JUMPER_2_NC_TRACE_SILK]  95.12,48.51 90 bottom
JP14  JUMPER-SMT_2_NC_TRACE_SILK  [SMT-JUMPER_2_NC_TRACE_SILK]  86.61,48.51 90 bottom
JP15  JUMPER-SMT_2_NC_TRACE_SILK  [SMT-JUMPER_2_NC_TRACE_SILK]  88.39,12.57 180 bottom
JP16  JUMPER-SMT_2_NC_TRACE_SILK  [SMT-JUMPER_2_NC_TRACE_SILK]  84.33,48.51 90 bottom
JP17  JUMPER-SMT_2_NC_TRACE_SILK  [SMT-JUMPER_2_NC_TRACE_SILK]  25.02,99.82 90 bottom
JP18  JUMPER-SMT_2_NC_TRACE_SILK  [SMT-JUMPER_2_NC_TRACE_SILK]  16.51,99.82 90 bottom
JP19  JUMPER-SMT_2_NC_TRACE_SILK  [SMT-JUMPER_2_NC_TRACE_SILK]  18.29,63.88 180 bottom
JP20  JUMPER-SMT_2_NC_TRACE_SILK  [SMT-JUMPER_2_NC_TRACE_SILK]  14.22,99.82 90 bottom
JP21  JUMPER-SMT_2_NC_TRACE_SILK  [SMT-JUMPER_2_NC_TRACE_SILK]  48.39,99.82 90 bottom
JP22  JUMPER-SMT_2_NC_TRACE_SILK  [SMT-JUMPER_2_NC_TRACE_SILK]  39.88,99.82 90 bottom
JP23  JUMPER-SMT_2_NC_TRACE_SILK  [SMT-JUMPER_2_NC_TRACE_SILK]  41.66,63.88 180 bottom
JP24  JUMPER-SMT_2_NC_TRACE_SILK  [SMT-JUMPER_2_NC_TRACE_SILK]  37.59,99.82 90 bottom
JP25  JUMPER-SMT_2_NC_TRACE_SILK  [SMT-JUMPER_2_NC_TRACE_SILK]  71.76,99.82 90 bottom
JP26  JUMPER-SMT_2_NC_TRACE_SILK  [SMT-JUMPER_2_NC_TRACE_SILK]  63.25,99.82 90 bottom
JP27  JUMPER-SMT_2_NC_TRACE_SILK  [SMT-JUMPER_2_NC_TRACE_SILK]  65.02,63.88 180 bottom
JP28  JUMPER-SMT_2_NC_TRACE_SILK  [SMT-JUMPER_2_NC_TRACE_SILK]  60.96,99.82 90 bottom
JP29  JUMPER-SMT_2_NC_TRACE_SILK  [SMT-JUMPER_2_NC_TRACE_SILK]  95.12,99.82 90 bottom
JP30  JUMPER-SMT_2_NC_TRACE_SILK  [SMT-JUMPER_2_NC_TRACE_SILK]  86.61,99.82 90 bottom
JP31  JUMPER-SMT_2_NC_TRACE_SILK  [SMT-JUMPER_2_NC_TRACE_SILK]  88.39,63.88 180 bottom
JP32  JUMPER-SMT_2_NC_TRACE_SILK  [SMT-JUMPER_2_NC_TRACE_SILK]  84.33,99.82 90 bottom
K1  TLP3475R  [TLP3475RTPF]  12.38,47.24 270 top
K2  TLP3475R  [TLP3475RTPF]  35.75,47.24 270 top
K3  TLP3475R  [TLP3475RTPF]  59.12,47.24 270 top
K4  TLP3475R  [TLP3475RTPF]  82.49,47.24 270 top
K5  TLP3475R  [TLP3475RTPF]  12.38,98.55 270 top
K6  TLP3475R  [TLP3475RTPF]  35.75,98.55 270 top
K7  TLP3475R  [TLP3475RTPF]  59.12,98.55 270 top
K8  TLP3475R  [TLP3475RTPF]  82.49,98.55 270 top
L1  30Ω  [0402-TIGHT]  18.61,19.75 180 top
L2  30Ω  [0402-TIGHT]  13.97,28.07 180 top
L3  30Ω  [0402-TIGHT]  13.21,34.54 270 top
L4  30Ω  [0402-TIGHT]  12.26,36.51 90 top
L5  15nH  [0402_COILCRAFT]  15.11,42.54 0 top
L6  27nH  [0402_COILCRAFT]  16.7,44.77 0 top
L7  18nH  [0402_COILCRAFT]  18.29,39.5 90 top
L8  12nH  [0402_COILCRAFT]  18.54,45.08 90 top
L9  30Ω  [0402-TIGHT]  15.62,23.75 270 top
L10  30Ω  [0402-TIGHT]  18.48,23.75 270 top
L11  30nH  [0402_COILCRAFT]  22.73,34.8 180 top
L12  51nH  [0402_COILCRAFT]  22.73,39.88 180 top
L13  30Ω  [0402-TIGHT]  26.73,34.1 90 top
L14  30Ω  [0402-TIGHT]  26.73,29.72 270 top
L15  30Ω  [0402-TIGHT]  26.73,31.75 90 top
L16  30Ω  [0402-TIGHT]  41.97,19.75 180 top
L17  30Ω  [0402-TIGHT]  50.1,34.1 90 top
L18  30Ω  [0402-TIGHT]  50.1,31.75 90 top
L19  30Ω  [0402-TIGHT]  38.99,23.75 270 top
L20  30Ω  [0402-TIGHT]  41.85,23.75 270 top
L21  30Ω  [0402-TIGHT]  35.62,36.51 90 top
L22  30Ω  [0402-TIGHT]  36.58,34.54 270 top
L23  30Ω  [0402-TIGHT]  37.34,28.07 180 top
L24  18nH  [0402_COILCRAFT]  41.66,39.5 90 top
L25  15nH  [0402_COILCRAFT]  38.48,42.54 0 top
L26  27nH  [0402_COILCRAFT]  40.07,44.77 0 top
L27  12nH  [0402_COILCRAFT]  41.91,45.08 90 top
L28  30nH  [0402_COILCRAFT]  46.1,34.8 180 top
L29  51nH  [0402_COILCRAFT]  46.1,39.88 180 top
L30  30Ω  [0402-TIGHT]  50.1,29.72 270 top
L31  30Ω  [0402-TIGHT]  65.34,19.75 180 top
L32  30Ω  [0402-TIGHT]  73.47,34.1 90 top
L33  30Ω  [0402-TIGHT]  73.47,31.75 90 top
L34  30Ω  [0402-TIGHT]  62.36,23.75 270 top
L35  30Ω  [0402-TIGHT]  65.21,23.75 270 top
L36  30Ω  [0402-TIGHT]  58.99,36.51 90 top
L37  30Ω  [0402-TIGHT]  59.94,34.54 270 top
L38  30Ω  [0402-TIGHT]  60.71,28.07 180 top
L39  18nH  [0402_COILCRAFT]  65.02,39.5 90 top
L40  15nH  [0402_COILCRAFT]  61.85,42.54 0 top
L41  27nH  [0402_COILCRAFT]  63.44,44.77 0 top
L42  12nH  [0402_COILCRAFT]  65.28,45.08 90 top
L43  30nH  [0402_COILCRAFT]  69.47,34.8 180 top
L44  51nH  [0402_COILCRAFT]  69.47,39.88 180 top
L45  30Ω  [0402-TIGHT]  73.47,29.72 270 top
L46  30Ω  [0402-TIGHT]  88.71,19.75 180 top
L47  30Ω  [0402-TIGHT]  96.84,34.1 90 top
L48  30Ω  [0402-TIGHT]  96.84,31.75 90 top
L49  30Ω  [0402-TIGHT]  85.73,23.75 270 top
L50  30Ω  [0402-TIGHT]  88.58,23.75 270 top
L51  30Ω  [0402-TIGHT]  82.36,36.51 90 top
L52  30Ω  [0402-TIGHT]  83.31,34.54 270 top
L53  30Ω  [0402-TIGHT]  84.07,28.07 180 top
L54  18nH  [0402_COILCRAFT]  88.39,39.5 90 top
L55  15nH  [0402_COILCRAFT]  85.22,42.54 0 top
L56  27nH  [0402_COILCRAFT]  86.8,44.77 0 top
L57  12nH  [0402_COILCRAFT]  88.65,45.08 90 top
L58  30nH  [0402_COILCRAFT]  92.84,34.8 180 top
L59  51nH  [0402_COILCRAFT]  92.84,39.88 180 top
L60  30Ω  [0402-TIGHT]  96.84,29.72 270 top
L61  30Ω  [0402-TIGHT]  18.61,71.06 180 top
L62  30Ω  [0402-TIGHT]  26.73,85.41 90 top
L63  30Ω  [0402-TIGHT]  26.73,83.06 90 top
L64  30Ω  [0402-TIGHT]  15.62,75.06 270 top
L65  30Ω  [0402-TIGHT]  18.48,75.06 270 top
L66  30Ω  [0402-TIGHT]  12.26,87.82 90 top
L67  30Ω  [0402-TIGHT]  13.21,85.85 270 top
L68  30Ω  [0402-TIGHT]  13.97,79.38 180 top
L69  18nH  [0402_COILCRAFT]  18.29,90.81 90 top
L70  15nH  [0402_COILCRAFT]  15.11,93.85 0 top
L71  27nH  [0402_COILCRAFT]  16.7,96.08 0 top
L72  12nH  [0402_COILCRAFT]  18.54,96.39 90 top
L73  30nH  [0402_COILCRAFT]  22.73,86.11 180 top
L74  51nH  [0402_COILCRAFT]  22.73,91.19 180 top
L75  30Ω  [0402-TIGHT]  26.73,81.03 270 top
L76  30Ω  [0402-TIGHT]  41.97,71.06 180 top
L77  30Ω  [0402-TIGHT]  50.1,85.41 90 top
L78  30Ω  [0402-TIGHT]  50.1,83.06 90 top
L79  30Ω  [0402-TIGHT]  38.99,75.06 270 top
L80  30Ω  [0402-TIGHT]  41.85,75.06 270 top
L81  30Ω  [0402-TIGHT]  35.62,87.82 90 top
L82  30Ω  [0402-TIGHT]  36.58,85.85 270 top
L83  30Ω  [0402-TIGHT]  37.34,79.38 180 top
L84  18nH  [0402_COILCRAFT]  41.66,90.81 90 top
L85  15nH  [0402_COILCRAFT]  38.48,93.85 0 top
L86  27nH  [0402_COILCRAFT]  40.07,96.08 0 top
L87  12nH  [0402_COILCRAFT]  41.91,96.39 90 top
L88  30nH  [0402_COILCRAFT]  46.1,86.11 180 top
L89  51nH  [0402_COILCRAFT]  46.1,91.19 180 top
L90  30Ω  [0402-TIGHT]  50.1,81.03 270 top
L91  30Ω  [0402-TIGHT]  65.34,71.06 180 top
L92  30Ω  [0402-TIGHT]  73.47,85.41 90 top
L93  30Ω  [0402-TIGHT]  73.47,83.06 90 top
L94  30Ω  [0402-TIGHT]  62.36,75.06 270 top
L95  30Ω  [0402-TIGHT]  65.21,75.06 270 top
L96  30Ω  [0402-TIGHT]  58.99,87.82 90 top
L97  30Ω  [0402-TIGHT]  59.94,85.85 270 top
L98  30Ω  [0402-TIGHT]  60.71,79.38 180 top
L99  18nH  [0402_COILCRAFT]  65.02,90.81 90 top
L100  15nH  [0402_COILCRAFT]  61.85,93.85 0 top
L101  27nH  [0402_COILCRAFT]  63.44,96.08 0 top
L102  12nH  [0402_COILCRAFT]  65.28,96.39 90 top
L103  30nH  [0402_COILCRAFT]  69.47,86.11 180 top
L104  51nH  [0402_COILCRAFT]  69.47,91.19 180 top
L105  30Ω  [0402-TIGHT]  73.47,81.03 270 top
L106  30Ω  [0402-TIGHT]  88.71,71.06 180 top
L107  30Ω  [0402-TIGHT]  96.84,85.41 90 top
L108  30Ω  [0402-TIGHT]  96.84,83.06 90 top
L109  30Ω  [0402-TIGHT]  85.73,75.06 270 top
L110  30Ω  [0402-TIGHT]  88.58,75.06 270 top
L111  30Ω  [0402-TIGHT]  82.36,87.82 90 top
L112  30Ω  [0402-TIGHT]  83.31,85.85 270 top
L113  30Ω  [0402-TIGHT]  84.07,79.38 180 top
L114  18nH  [0402_COILCRAFT]  88.39,90.81 90 top
L115  15nH  [0402_COILCRAFT]  85.22,93.85 0 top
L116  27nH  [0402_COILCRAFT]  86.8,96.08 0 top
L117  12nH  [0402_COILCRAFT]  88.65,96.39 90 top
L118  30nH  [0402_COILCRAFT]  92.84,86.11 180 top
L119  51nH  [0402_COILCRAFT]  92.84,91.19 180 top
L120  30Ω  [0402-TIGHT]  96.84,81.03 270 top
LOGO1  OSHW-LOGOS  [OSHW-LOGO-S]  46.74,13.21 0 top
LOGO2  OSHW-LOGOS  [OSHW-LOGO-S]  23.37,13.21 0 top
LOGO3  OSHW-LOGOS  [OSHW-LOGO-S]  13.21,13.21 0 bottom
LOGO4  OSHW-LOGOS  [OSHW-LOGO-S]  36.58,13.21 0 bottom
LOGO5  OSHW-LOGOS  [OSHW-LOGO-S]  70.1,13.21 0 top
LOGO6  OSHW-LOGOS  [OSHW-LOGO-S]  59.94,13.21 0 bottom
LOGO7  OSHW-LOGOS  [OSHW-LOGO-S]  93.47,13.21 0 top
LOGO8  OSHW-LOGOS  [OSHW-LOGO-S]  83.31,13.21 0 bottom
LOGO9  OSHW-LOGOS  [OSHW-LOGO-S]  23.37,64.52 0 top
LOGO10  OSHW-LOGOS  [OSHW-LOGO-S]  13.21,64.52 0 bottom
LOGO11  OSHW-LOGOS  [OSHW-LOGO-S]  46.74,64.52 0 top
LOGO12  OSHW-LOGOS  [OSHW-LOGO-S]  36.58,64.52 0 bottom
LOGO13  OSHW-LOGOS  [OSHW-LOGO-S]  70.1,64.52 0 top
LOGO14  OSHW-LOGOS  [OSHW-LOGO-S]  59.94,64.52 0 bottom
LOGO15  OSHW-LOGOS  [OSHW-LOGO-S]  93.47,64.52 0 top
LOGO16  OSHW-LOGOS  [OSHW-LOGO-S]  83.31,64.52 0 bottom
Q1  3.1A/30V/105mΩ  [SOT23-3]  11.18,22.35 180 top
Q2  3.1A/30V/105mΩ  [SOT23-3]  34.54,22.35 180 top
Q3  3.1A/30V/105mΩ  [SOT23-3]  57.91,22.35 180 top
Q4  3.1A/30V/105mΩ  [SOT23-3]  81.28,22.35 180 top
Q5  3.1A/30V/105mΩ  [SOT23-3]  11.18,73.66 180 top
Q6  3.1A/30V/105mΩ  [SOT23-3]  34.54,73.66 180 top
Q7  3.1A/30V/105mΩ  [SOT23-3]  57.91,73.66 180 top
Q8  3.1A/30V/105mΩ  [SOT23-3]  81.28,73.66 180 top
R1  10k  [0402-TIGHT]  10.79,12.26 180 top
R2  0  [0402-TIGHT]  20.38,21.78 90 top
R3  3.9OHM  [0402-TIGHT]  11.87,42.23 270 top
R4  33k  [0402-TIGHT]  13.97,27.11 180 top
R5  100k  [0402-TIGHT]  13.97,26.16 180 top
R6  220OHM  [0402-TIGHT]  18.8,36.2 180 top
R7  10k  [0402-TIGHT]  13.97,46.55 90 top
R8  100k  [0402-TIGHT]  13.97,25.21 0 top
R9  1k  [0402-TIGHT]  13.91,51.31 270 top
R10  100k  [0402-TIGHT]  13.53,22.42 90 top
R11  0  [0402-TIGHT]  20.38,19.81 270 top
R12  1k  [0402-TIGHT]  23.37,50.67 270 top
R13  1k  [0402-TIGHT]  19.56,50.67 270 top
R14  470  [0402-TIGHT]  20.64,39.12 270 top
R15  1k  [0402-TIGHT]  18.29,14.48 0 top
R16  10k  [0402-TIGHT]  11.11,16.76 180 top
R17  47  [0402-TIGHT]  20.64,36.7 90 top
R18  10k  [0402-TIGHT]  34.16,12.26 180 top
R19  0  [0402-TIGHT]  43.75,21.78 90 top
R20  0  [0402-TIGHT]  43.75,19.81 270 top
R21  1k  [0402-TIGHT]  46.74,50.67 270 top
R22  1k  [0402-TIGHT]  42.93,50.67 270 top
R23  100k  [0402-TIGHT]  37.34,25.21 0 top
R24  100k  [0402-TIGHT]  37.34,26.16 180 top
R25  33k  [0402-TIGHT]  37.34,27.11 180 top
R26  220OHM  [0402-TIGHT]  42.16,36.2 180 top
R27  10k  [0402-TIGHT]  37.34,46.55 90 top
R28  3.9OHM  [0402-TIGHT]  35.24,42.23 270 top
R29  1k  [0402-TIGHT]  41.66,14.48 0 top
R30  10k  [0402-TIGHT]  34.48,16.76 180 top
R31  1k  [0402-TIGHT]  37.27,51.31 270 top
R32  100k  [0402-TIGHT]  36.89,22.42 90 top
R33  470  [0402-TIGHT]  44.01,39.12 270 top
R34  47  [0402-TIGHT]  44.01,36.7 90 top
R35  10k  [0402-TIGHT]  57.53,12.26 180 top
R36  0  [0402-TIGHT]  67.12,21.78 90 top
R37  0  [0402-TIGHT]  67.12,19.81 270 top
R38  1k  [0402-TIGHT]  70.1,50.67 270 top
R39  1k  [0402-TIGHT]  66.29,50.67 270 top
R40  100k  [0402-TIGHT]  60.71,25.21 0 top
R41  100k  [0402-TIGHT]  60.71,26.16 180 top
R42  33k  [0402-TIGHT]  60.71,27.11 180 top
R43  220OHM  [0402-TIGHT]  65.53,36.2 180 top
R44  10k  [0402-TIGHT]  60.71,46.55 90 top
R45  3.9OHM  [0402-TIGHT]  58.61,42.23 270 top
R46  1k  [0402-TIGHT]  65.02,14.48 0 top
R47  10k  [0402-TIGHT]  57.85,16.76 180 top
R48  1k  [0402-TIGHT]  60.64,51.31 270 top
R49  100k  [0402-TIGHT]  60.26,22.42 90 top
R50  470  [0402-TIGHT]  67.37,39.12 270 top
R51  47  [0402-TIGHT]  67.37,36.7 90 top
R52  10k  [0402-TIGHT]  80.9,12.26 180 top
R53  0  [0402-TIGHT]  90.49,21.78 90 top
R54  0  [0402-TIGHT]  90.49,19.81 270 top
R55  1k  [0402-TIGHT]  93.47,50.67 270 top
R56  1k  [0402-TIGHT]  89.66,50.67 270 top
R57  100k  [0402-TIGHT]  84.07,25.21 0 top
R58  100k  [0402-TIGHT]  84.07,26.16 180 top
R59  33k  [0402-TIGHT]  84.07,27.11 180 top
R60  220OHM  [0402-TIGHT]  88.9,36.2 180 top
R61  10k  [0402-TIGHT]  84.07,46.55 90 top
R62  3.9OHM  [0402-TIGHT]  81.98,42.23 270 top
R63  1k  [0402-TIGHT]  88.39,14.48 0 top
R64  10k  [0402-TIGHT]  81.22,16.76 180 top
R65  1k  [0402-TIGHT]  84.01,51.31 270 top
R66  100k  [0402-TIGHT]  83.63,22.42 90 top
R67  470  [0402-TIGHT]  90.74,39.12 270 top
R68  47  [0402-TIGHT]  90.74,36.7 90 top
R69  10k  [0402-TIGHT]  10.79,63.56 180 top
R70  0  [0402-TIGHT]  20.38,73.09 90 top
R71  0  [0402-TIGHT]  20.38,71.12 270 top
R72  1k  [0402-TIGHT]  23.37,101.98 270 top
R73  1k  [0402-TIGHT]  19.56,101.98 270 top
R74  100k  [0402-TIGHT]  13.97,76.52 0 top
R75  100k  [0402-TIGHT]  13.97,77.47 180 top
R76  33k  [0402-TIGHT]  13.97,78.42 180 top
R77  220OHM  [0402-TIGHT]  18.8,87.5 180 top
R78  10k  [0402-TIGHT]  13.97,97.85 90 top
R79  3.9OHM  [0402-TIGHT]  11.87,93.54 270 top
R80  1k  [0402-TIGHT]  18.29,65.79 0 top
R81  10k  [0402-TIGHT]  11.11,68.07 180 top
R82  1k  [0402-TIGHT]  13.91,102.62 270 top
R83  100k  [0402-TIGHT]  13.53,73.72 90 top
R84  470  [0402-TIGHT]  20.64,90.42 270 top
R85  47  [0402-TIGHT]  20.64,88.01 90 top
R86  10k  [0402-TIGHT]  34.16,63.56 180 top
R87  0  [0402-TIGHT]  43.75,73.09 90 top
R88  0  [0402-TIGHT]  43.75,71.12 270 top
R89  1k  [0402-TIGHT]  46.74,101.98 270 top
R90  1k  [0402-TIGHT]  42.93,101.98 270 top
R91  100k  [0402-TIGHT]  37.34,76.52 0 top
R92  100k  [0402-TIGHT]  37.34,77.47 180 top
R93  33k  [0402-TIGHT]  37.34,78.42 180 top
R94  220OHM  [0402-TIGHT]  42.16,87.5 180 top
R95  10k  [0402-TIGHT]  37.34,97.85 90 top
R96  3.9OHM  [0402-TIGHT]  35.24,93.54 270 top
R97  1k  [0402-TIGHT]  41.66,65.79 0 top
R98  10k  [0402-TIGHT]  34.48,68.07 180 top
R99  1k  [0402-TIGHT]  37.27,102.62 270 top
R100  100k  [0402-TIGHT]  36.89,73.72 90 top
R101  470  [0402-TIGHT]  44.01,90.42 270 top
R102  47  [0402-TIGHT]  44.01,88.01 90 top
R103  10k  [0402-TIGHT]  57.53,63.56 180 top
R104  0  [0402-TIGHT]  67.12,73.09 90 top
R105  0  [0402-TIGHT]  67.12,71.12 270 top
R106  1k  [0402-TIGHT]  70.1,101.98 270 top
R107  1k  [0402-TIGHT]  66.29,101.98 270 top
R108  100k  [0402-TIGHT]  60.71,76.52 0 top
R109  100k  [0402-TIGHT]  60.71,77.47 180 top
R110  33k  [0402-TIGHT]  60.71,78.42 180 top
R111  220OHM  [0402-TIGHT]  65.53,87.5 180 top
R112  10k  [0402-TIGHT]  60.71,97.85 90 top
R113  3.9OHM  [0402-TIGHT]  58.61,93.54 270 top
R114  1k  [0402-TIGHT]  65.02,65.79 0 top
R115  10k  [0402-TIGHT]  57.85,68.07 180 top
R116  1k  [0402-TIGHT]  60.64,102.62 270 top
R117  100k  [0402-TIGHT]  60.26,73.72 90 top
R118  470  [0402-TIGHT]  67.37,90.42 270 top
R119  47  [0402-TIGHT]  67.37,88.01 90 top
R120  10k  [0402-TIGHT]  80.9,63.56 180 top
R121  0  [0402-TIGHT]  90.49,73.09 90 top
R122  0  [0402-TIGHT]  90.49,71.12 270 top
R123  1k  [0402-TIGHT]  93.47,101.98 270 top
R124  1k  [0402-TIGHT]  89.66,101.98 270 top
R125  100k  [0402-TIGHT]  84.07,76.52 0 top
R126  100k  [0402-TIGHT]  84.07,77.47 180 top
R127  33k  [0402-TIGHT]  84.07,78.42 180 top
R128  220OHM  [0402-TIGHT]  88.9,87.5 180 top
R129  10k  [0402-TIGHT]  84.07,97.85 90 top
R130  3.9OHM  [0402-TIGHT]  81.98,93.54 270 top
R131  1k  [0402-TIGHT]  88.39,65.79 0 top
R132  10k  [0402-TIGHT]  81.22,68.07 180 top
R133  1k  [0402-TIGHT]  84.01,102.62 270 top
R134  100k  [0402-TIGHT]  83.63,73.72 90 top
R135  470  [0402-TIGHT]  90.74,90.42 270 top
R136  47  [0402-TIGHT]  90.74,88.01 90 top
SPARKX1  SPARKX-LOGO4  [SPARKX-MEDIUM]  18.29,9.4 0 top
SPARKX2  SPARKX-LOGO4  [SPARKX-MEDIUM]  18.29,9.4 0 bottom
SPARKX3  SPARKX-LOGO4  [SPARKX-MEDIUM]  41.66,9.4 0 bottom
SPARKX4  SPARKX-LOGO4  [SPARKX-MEDIUM]  41.66,9.4 0 top
SPARKX5  SPARKX-LOGO4  [SPARKX-MEDIUM]  65.02,9.4 0 bottom
SPARKX6  SPARKX-LOGO4  [SPARKX-MEDIUM]  65.02,9.4 0 top
SPARKX7  SPARKX-LOGO4  [SPARKX-MEDIUM]  88.39,9.4 0 bottom
SPARKX8  SPARKX-LOGO4  [SPARKX-MEDIUM]  88.39,9.4 0 top
SPARKX9  SPARKX-LOGO4  [SPARKX-MEDIUM]  18.29,60.71 0 bottom
SPARKX10  SPARKX-LOGO4  [SPARKX-MEDIUM]  18.29,60.71 0 top
SPARKX11  SPARKX-LOGO4  [SPARKX-MEDIUM]  41.66,60.71 0 bottom
SPARKX12  SPARKX-LOGO4  [SPARKX-MEDIUM]  41.66,60.71 0 top
SPARKX13  SPARKX-LOGO4  [SPARKX-MEDIUM]  65.02,60.71 0 bottom
SPARKX14  SPARKX-LOGO4  [SPARKX-MEDIUM]  65.02,60.71 0 top
SPARKX15  SPARKX-LOGO4  [SPARKX-MEDIUM]  88.39,60.71 0 bottom
SPARKX16  SPARKX-LOGO4  [SPARKX-MEDIUM]  88.39,60.71 0 top
TP1  TEST-POINTTP_15TH_THRU  [TP_15TH]  15.75,15.75 0 top
TP2  TEST-POINTTP_15TH_THRU  [TP_15TH]  15.75,20.83 0 top
TP3  TEST-POINTTP_15TH_THRU  [TP_15TH]  20.83,18.29 0 top
TP4  TEST-POINTTP_15TH_THRU  [TP_15TH]  14.48,39.88 0 top
TP5  TEST-POINTTP_15TH_THRU  [TP_15TH]  39.12,15.75 0 top
TP6  TEST-POINTTP_15TH_THRU  [TP_15TH]  39.12,20.83 0 top
TP7  TEST-POINTTP_15TH_THRU  [TP_15TH]  44.2,18.29 0 top
TP8  TEST-POINTTP_15TH_THRU  [TP_15TH]  37.85,39.88 0 top
TP9  TEST-POINTTP_15TH_THRU  [TP_15TH]  62.48,15.75 0 top
TP10  TEST-POINTTP_15TH_THRU  [TP_15TH]  62.48,20.83 0 top
TP11  TEST-POINTTP_15TH_THRU  [TP_15TH]  67.56,18.29 0 top
TP12  TEST-POINTTP_15TH_THRU  [TP_15TH]  61.21,39.88 0 top
TP13  TEST-POINTTP_15TH_THRU  [TP_15TH]  85.85,15.75 0 top
TP14  TEST-POINTTP_15TH_THRU  [TP_15TH]  85.85,20.83 0 top
TP15  TEST-POINTTP_15TH_THRU  [TP_15TH]  90.93,18.29 0 top
TP16  TEST-POINTTP_15TH_THRU  [TP_15TH]  84.58,39.88 0 top
TP17  TEST-POINTTP_15TH_THRU  [TP_15TH]  15.75,67.06 0 top
TP18  TEST-POINTTP_15TH_THRU  [TP_15TH]  15.75,72.14 0 top
TP19  TEST-POINTTP_15TH_THRU  [TP_15TH]  20.83,69.6 0 top
TP20  TEST-POINTTP_15TH_THRU  [TP_15TH]  14.48,91.19 0 top
TP21  TEST-POINTTP_15TH_THRU  [TP_15TH]  39.12,67.06 0 top
TP22  TEST-POINTTP_15TH_THRU  [TP_15TH]  39.12,72.14 0 top
TP23  TEST-POINTTP_15TH_THRU  [TP_15TH]  44.2,69.6 0 top
TP24  TEST-POINTTP_15TH_THRU  [TP_15TH]  37.85,91.19 0 top
TP25  TEST-POINTTP_15TH_THRU  [TP_15TH]  62.48,67.06 0 top
TP26  TEST-POINTTP_15TH_THRU  [TP_15TH]  62.48,72.14 0 top
TP27  TEST-POINTTP_15TH_THRU  [TP_15TH]  67.56,69.6 0 top
TP28  TEST-POINTTP_15TH_THRU  [TP_15TH]  61.21,91.19 0 top
TP29  TEST-POINTTP_15TH_THRU  [TP_15TH]  85.85,67.06 0 top
TP30  TEST-POINTTP_15TH_THRU  [TP_15TH]  85.85,72.14 0 top
TP31  TEST-POINTTP_15TH_THRU  [TP_15TH]  90.93,69.6 0 top
TP32  TEST-POINTTP_15TH_THRU  [TP_15TH]  84.58,91.19 0 top
U1  2Mbit SPI Flash  [SO08]  24,20.83 0 top
U2  1.8V/100mA  [SC70]  16.57,17.59 270 top
U3  ARTIC_R2  [QFN-48]  20.07,29.59 90 top
U4  RFPA0133  [QFN50P300X300X86-17N]  18.03,42.29 90 top
U5  AS179-92LF  [SOT65P220X100-6N]  21.46,47.88 90 top
U6  3.0V  [SOT23-5]  12.89,39.69 270 top
U7  3.3V  [SOT23-5]  10.67,14.48 270 top
U8  3.3V  [SOT23-5]  10.67,18.92 270 top
U9  ARTIC_R2  [QFN-48]  43.43,29.59 90 top
U10  RFPA0133  [QFN50P300X300X86-17N]  41.4,42.29 90 top
U11  AS179-92LF  [SOT65P220X100-6N]  44.83,47.88 90 top
U12  1.8V/100mA  [SC70]  39.94,17.59 270 top
U13  2Mbit SPI Flash  [SO08]  47.37,20.83 0 top
U14  3.3V  [SOT23-5]  34.04,14.48 270 top
U15  3.3V  [SOT23-5]  34.04,18.92 270 top
U16  3.0V  [SOT23-5]  36.26,39.69 270 top
U17  ARTIC_R2  [QFN-48]  66.8,29.59 90 top
U18  RFPA0133  [QFN50P300X300X86-17N]  64.77,42.29 90 top
U19  AS179-92LF  [SOT65P220X100-6N]  68.2,47.88 90 top
U20  1.8V/100mA  [SC70]  63.31,17.59 270 top
U21  2Mbit SPI Flash  [SO08]  70.74,20.83 0 top
U22  3.3V  [SOT23-5]  57.4,14.48 270 top
U23  3.3V  [SOT23-5]  57.4,18.92 270 top
U24  3.0V  [SOT23-5]  59.63,39.69 270 top
U25  ARTIC_R2  [QFN-48]  90.17,29.59 90 top
U26  RFPA0133  [QFN50P300X300X86-17N]  88.14,42.29 90 top
U27  AS179-92LF  [SOT65P220X100-6N]  91.57,47.88 90 top
U28  1.8V/100mA  [SC70]  86.68,17.59 270 top
U29  2Mbit SPI Flash  [SO08]  94.11,20.83 0 top
U30  3.3V  [SOT23-5]  80.77,14.48 270 top
U31  3.3V  [SOT23-5]  80.77,18.92 270 top
U32  3.0V  [SOT23-5]  82.99,39.69 270 top
U33  ARTIC_R2  [QFN-48]  20.07,80.9 90 top
U34  RFPA0133  [QFN50P300X300X86-17N]  18.03,93.6 90 top
U35  AS179-92LF  [SOT65P220X100-6N]  21.46,99.19 90 top
U36  1.8V/100mA  [SC70]  16.57,68.9 270 top
U37  2Mbit SPI Flash  [SO08]  24,72.14 0 top
U38  3.3V  [SOT23-5]  10.67,65.79 270 top
U39  3.3V  [SOT23-5]  10.67,70.23 270 top
U40  3.0V  [SOT23-5]  12.89,91 270 top
U41  ARTIC_R2  [QFN-48]  43.43,80.9 90 top
U42  RFPA0133  [QFN50P300X300X86-17N]  41.4,93.6 90 top
U43  AS179-92LF  [SOT65P220X100-6N]  44.83,99.19 90 top
U44  1.8V/100mA  [SC70]  39.94,68.9 270 top
U45  2Mbit SPI Flash  [SO08]  47.37,72.14 0 top
U46  3.3V  [SOT23-5]  34.04,65.79 270 top
U47  3.3V  [SOT23-5]  34.04,70.23 270 top
U48  3.0V  [SOT23-5]  36.26,91 270 top
U49  ARTIC_R2  [QFN-48]  66.8,80.9 90 top
U50  RFPA0133  [QFN50P300X300X86-17N]  64.77,93.6 90 top
U51  AS179-92LF  [SOT65P220X100-6N]  68.2,99.19 90 top
U52  1.8V/100mA  [SC70]  63.31,68.9 270 top
U53  2Mbit SPI Flash  [SO08]  70.74,72.14 0 top
U54  3.3V  [SOT23-5]  57.4,65.79 270 top
U55  3.3V  [SOT23-5]  57.4,70.23 270 top
U56  3.0V  [SOT23-5]  59.63,91 270 top
U57  ARTIC_R2  [QFN-48]  90.17,80.9 90 top
U58  RFPA0133  [QFN50P300X300X86-17N]  88.14,93.6 90 top
U59  AS179-92LF  [SOT65P220X100-6N]  91.57,99.19 90 top
U60  1.8V/100mA  [SC70]  86.68,68.9 270 top
U61  2Mbit SPI Flash  [SO08]  94.11,72.14 0 top
U62  3.3V  [SOT23-5]  80.77,65.79 270 top
U63  3.3V  [SOT23-5]  80.77,70.23 270 top
U64  3.0V  [SOT23-5]  82.99,91 270 top
U$1  [#TX#0]  26.54,51.31 90 top
U$2  [#RX#0]  17.91,54.29 90 top
U$3  [#RX_LED#0]  16.45,52.58 270 bottom
U$4  [#TX_LED#0]  24.7,52.64 270 bottom
U$5  [#RF_LED#0]  14.22,52.51 270 bottom
U$6  [#G8#0]  10.67,46.23 0 bottom
U$7  [#RF#0]  15.75,54.23 90 top
U$8  [#RF_EN#0]  11.81,30.99 0 bottom
U$9  [CIPO#0]  25.46,43.69 0 bottom
U$10  [#CIPO0]  25.46,43.69 0 top
U$11  [#COPI0]  25.46,41.15 0 top
U$12  [COPI#0]  25.46,41.15 0 bottom
U$13  [#SCLK0]  25.4,38.61 0 top
U$14  [SCLK#0]  25.4,38.61 0 bottom
U$15  [#CS0]  26.29,36.07 0 top
U$16  [CS#0]  26.29,36.07 0 bottom
U$17  [GND#0]  25.72,20.83 0 bottom
U$18  [#RESETB0]  12.26,36.07 0 bottom
U$19  [#PWR_EN0]  12.19,33.53 0 bottom
U$20  [#VBATT#0]  12.51,23.37 0 bottom
U$21  [#VUSB#0]  11.75,28.45 0 bottom
U$22  [#RX_LED#0]  39.81,52.58 270 bottom
U$23  [#TX_LED#0]  48.07,52.64 270 bottom
U$24  [#BOOT0]  11.56,43.69 0 bottom
U$25  [#INT10]  10.99,41.15 0 bottom
U$26  [#INT20]  11.11,38.61 0 bottom
U$27  [#PWR_LED#0]  18.29,14.48 0 bottom
U$28  [#PWR#0]  18.35,13.21 0 top
U$29  [ARTIC_R2_BREAKOUT0]  18.29,30.99 90 bottom
U$30  [#TX#0]  49.91,51.31 90 top
U$31  [#RX#0]  41.27,54.29 90 top
U$32  [CIPO#0]  48.83,43.69 0 bottom
U$33  [#CIPO0]  48.83,43.69 0 top
U$34  [#COPI0]  48.83,41.15 0 top
U$35  [COPI#0]  48.83,41.15 0 bottom
U$36  [#SCLK0]  48.77,38.61 0 top
U$37  [SCLK#0]  48.77,38.61 0 bottom
U$38  [#CS0]  49.66,36.07 0 top
U$39  [CS#0]  49.66,36.07 0 bottom
U$40  [#BOOT0]  34.92,43.69 0 bottom
U$41  [#RESETB0]  35.62,36.07 0 bottom